# Allegro board democ2.brd
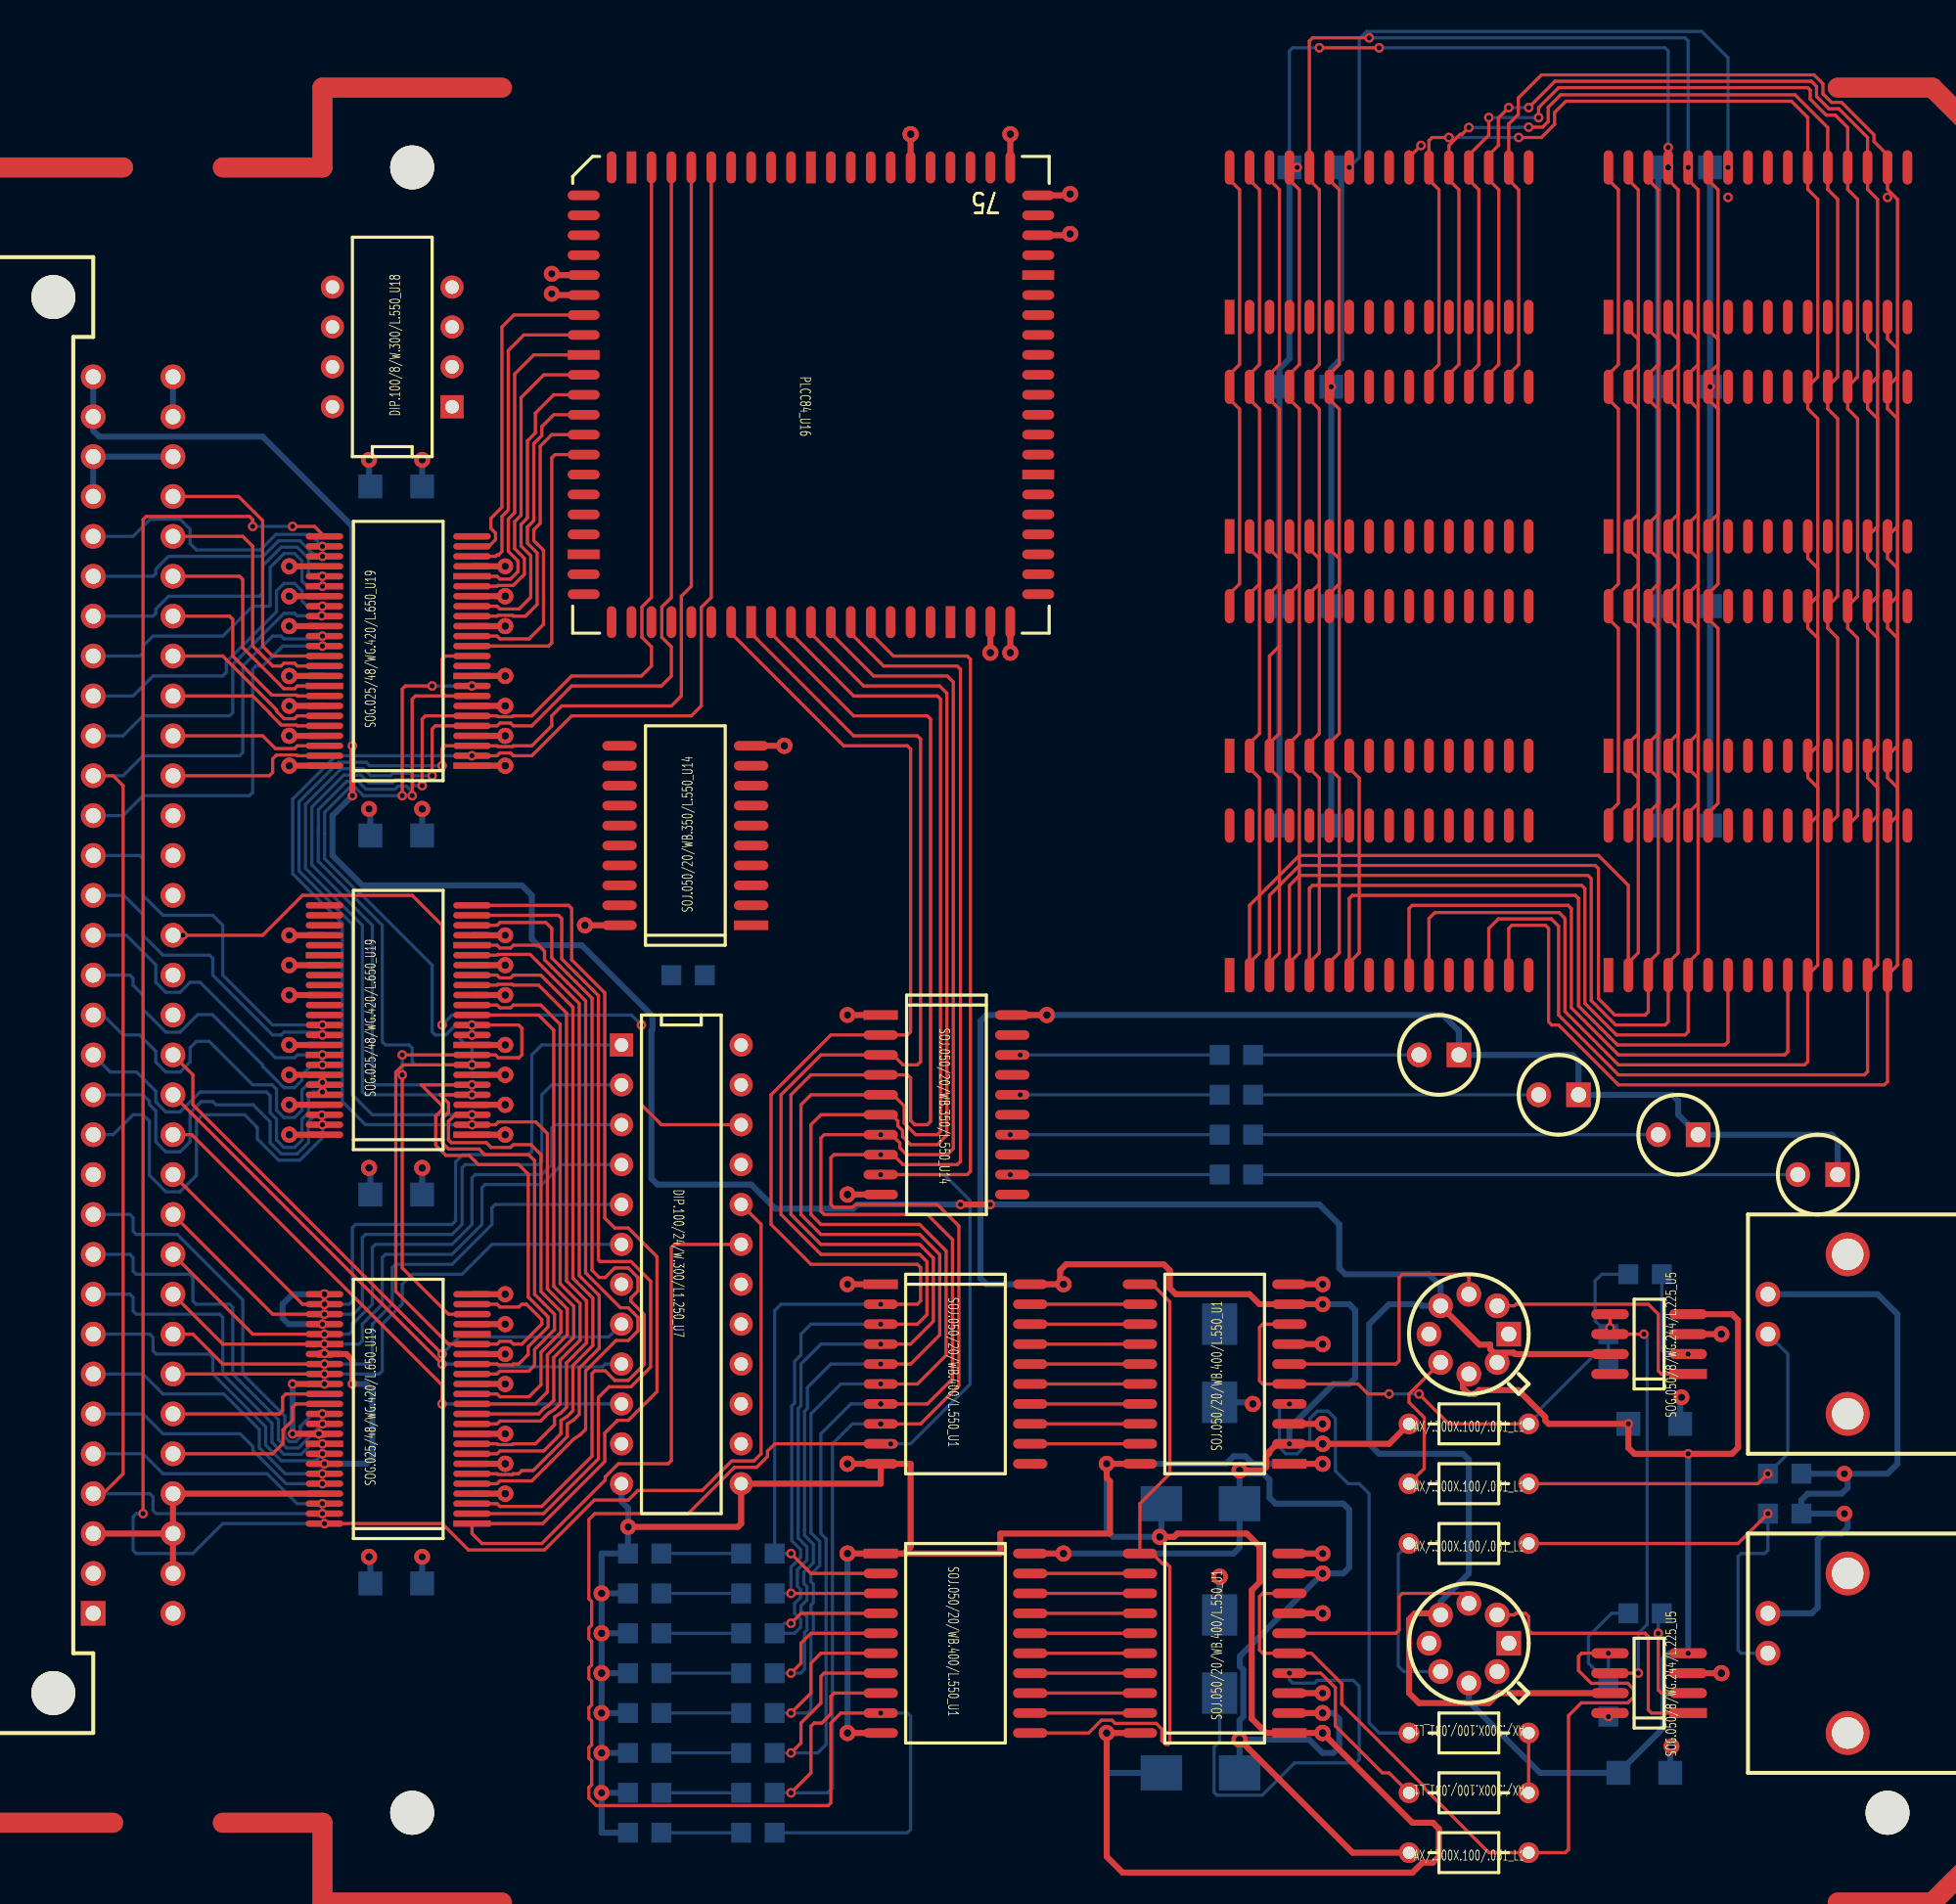
[diagram p0: board, top side]
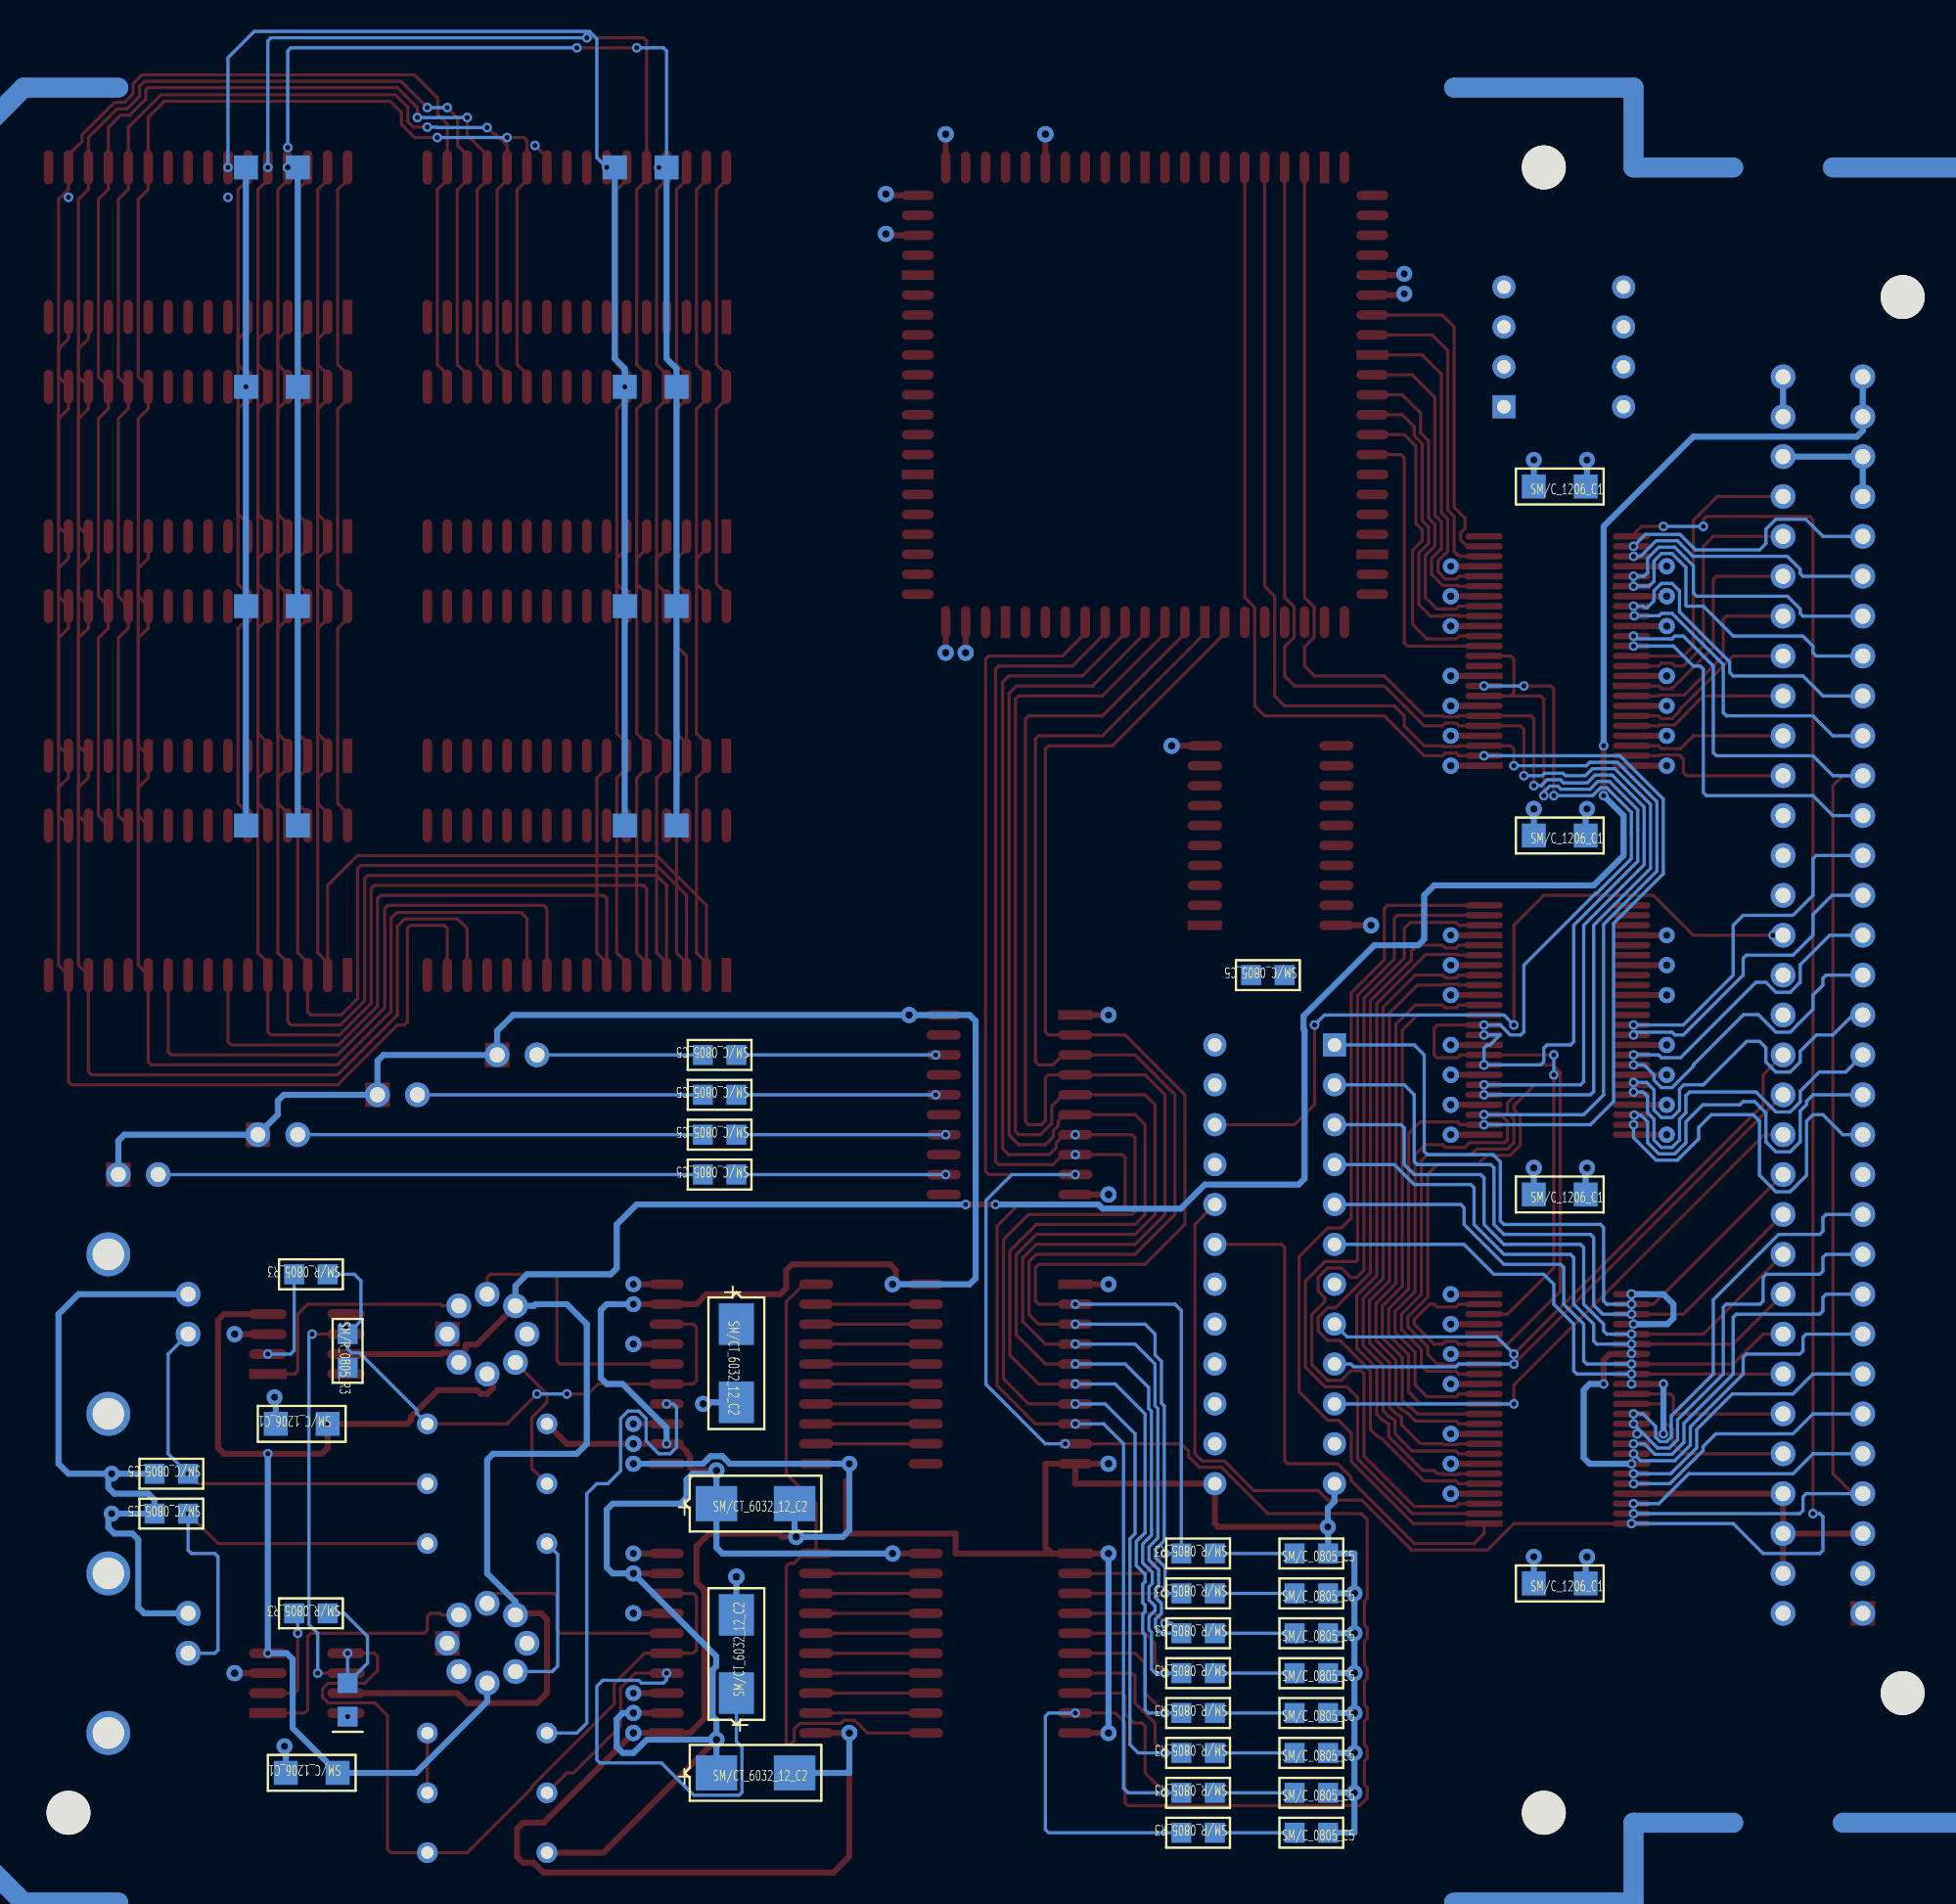
[diagram p1: board, bottom side, seen from below]

No outline. copper layers: TOP, GND, POWER, BOTTOM. Coordinates in mm from the lowest, leftmost part position.

## Design rules (mm)
nets with their own width: min track width 0.203; nets A0 A1 A2 A3 A4 A5 A6 A7 A8 A9 A10 A11 A12 A13 A14 A15 A16 A17 A18 A19 A20 A21 A22 A23 AEN/ BA0 BA1 BA2 BA3 BD0 BD1 BD2 BD3 BD4 BD5 BD6 BD7 BD8 BD9 BD10 BD11 BD12 BD13 BD14 BD15 BRD/ BRESET BWR/ D0 D1 D2 D3 D4 D5 D6 D7 D9 D10 D11 D12 D13 D14 D15 DDIR DEN/ DHEN/ FPGA/ GAIN HS/ MCLK MRD/ MWR/ N00036 N00036_6360 N00038 N00038_6372 N00044 N00044_6366 N00046 N00046_6362 N00048 N00048_6359 N00060 N00060_6368 N00306 N00318 N00322 N00671 N00689 N00703 N00717 N00827 N00831 N00835 N00837 N04966 N05690 N05692 N05694 N05696 N05698 N05700 N05702 N05704 N11940 N11950 N11984 N11994 N12004 N19706 N19710 N19714 N19718 N19934 N19938 N19942 N23417 N23878 N24816 N24821 N24826 N84247 N103899 N255822 N314771 N315146 N315333 N320476 N336036 N336041 OUTA OUTC RA0 RA1 RA2 RA3 RA4 RA5 RA6 RA7 RA8 RA9 RA10 RA11 RA12 RA13 RA14 RA15 RD0 RD1 RD2 RD3 RD4 RD5 RD6 RD7 RDY/ RESET/ SEL VCLKA VCLKC VD0 VD1 VD2 VD3 VD4 VD5 VD6 VD7 WAIT/ WSTAT/
nets with their own width: min track width 0.381; nets AGND GND GND_EARTH V12N V+12 VCC

## Placement (name value [footprint] x y rotation side)
C1  .1UF  [SMC1206]  97.79 27.3 0 bottom
C2  .1UF  [SMCT603212]  73.02 22.22 180 bottom
C3  .1UF  [SMCT603212]  73.02 5.08 180 bottom
C4  .1UF  [SMC1206]  99.69 107.32 0 bottom
C5  3300  [SMC0805]  36.2 3.81 180 bottom
C6  .1UF  [SMC1206]  97.16 5.08 0 bottom
C7  3300  [SMC0805]  36.2 19.05 180 bottom
C8  3300  [SMC0805]  36.2 6.35 180 bottom
C9  .1UF  [SMC1206]  20.95 87 180 bottom
C10  .1UF  [SMC1206]  20.95 64.77 180 bottom
C11  .1UF  [SMC1206]  20.95 41.91 180 bottom
C12  .1UF  [SMC1206]  99.69 79.38 0 bottom
C13  .1UF  [SMC1206]  99.69 93.35 0 bottom
C14  .1UF  [SMC1206]  99.69 65.41 0 bottom
C15  .1UF  [SMC1206]  20.95 17.14 180 bottom
C16  3300  [SMC0805]  36.2 8.89 180 bottom
C17  3300  [SMC0805]  36.2 11.43 180 bottom
C18  47PF  [SMC0805]  106.68 24.13 0 bottom
C19  3300  [SMC0805]  36.2 1.27 180 bottom
C20  3300  [SMC0805]  36.2 13.97 180 bottom
C21  .1UF  [SMCT603212]  71.75 10.16 90 bottom
C22  .1UF  [SMCT603212]  71.75 33.66 270 bottom
C23  47PF  [SMC0805]  106.68 21.59 0 bottom
C24  3300  [SMC0805]  36.2 16.51 180 bottom
C25  .1UF  [SMC1206]  76.2 107.32 0 bottom
C26  .1UF  [SMC1206]  75.56 93.35 0 bottom
C27  .1UF  [SMC1206]  75.56 79.38 0 bottom
C28  .1UF  [SMC1206]  75.56 65.41 0 bottom
D1  DIODE PHOTO EMIT  [LED]  94.61 48.26 180 top
D2  DIODE PHOTO EMIT  [LED]  86.99 50.8 180 top
D3  DIODE PHOTO EMIT  [LED]  102.23 45.72 180 top
D4  DIODE PHOTO EMIT  [LED]  111.12 43.18 180 top
J1  CON PAD  [DIN64P]  0 15.24 90 top
J2  CHANNEL 1  [BNC2P]  106.68 12.7 270 top
J3  CHANNEL 2  [BNC2P]  106.68 33.02 270 top
L1  50  [AX300X100031]  83.82 19.68 0 top
L2  50  [AX300X100031]  83.82 27.3 0 top
L3  50  [AX300X100031]  91.44 3.81 180 top
L4  50  [AX300X100031]  83.82 23.49 0 top
L5  50  [AX300X100031]  91.44 7.62 180 top
L6  50  [AX300X100031]  83.82 0 0 top
MTH1  -  [MTHOLE1]  20.32 107.32 0 top
MTH2  -  [MTHOLE1]  20.32 2.54 0 top
MTH3  -  [MTHOLE1]  114.3 2.54 0 top
R1  150  [SMC0805]  71.75 50.8 0 bottom
R2  150  [SMC0805]  71.75 48.26 0 bottom
R3  100  [SMR0805]  97.79 15.24 0 bottom
R4  100  [SMR0805]  96.52 10.8 270 bottom
R5  100  [SMR0805]  96.52 33.02 270 bottom
R6  100  [SMR0805]  97.79 36.83 0 bottom
R7  50  [SMR0805]  41.27 19.05 0 bottom
R8  50  [SMR0805]  41.27 6.35 0 bottom
R9  50  [SMR0805]  41.27 8.89 0 bottom
R10  50  [SMR0805]  41.27 3.81 0 bottom
R11  50  [SMC0805]  36.83 55.88 0 bottom
R12  150  [SMC0805]  71.75 43.18 0 bottom
R13  50  [SMR0805]  41.27 16.51 0 bottom
R14  50  [SMR0805]  41.27 13.97 0 bottom
R15  50  [SMR0805]  41.27 11.43 0 bottom
R16  50  [SMR0805]  41.27 1.27 0 bottom
R17  150  [SMC0805]  71.75 45.72 0 bottom
U1  TLC5602A  [SOJ05020WB400L550]  76.2 7.62 90 top
U2  TLC5602A  [SOJ05020WB400L550]  76.2 24.77 90 top
U3  TC55B4257J  [SOJ05032WB400L850]  96.52 83.82 0 top
U4  TC55B4257J  [SOJ05032WB400L850]  96.52 97.79 0 top
U5  DG419A  [SOG0508WG244L225]  101.6 30.48 90 top
U6  DG419A  [SOG0508WG244L225]  101.6 8.89 90 top
U7  20L10  [DIP10024W300L1250]  33.66 51.44 270 top
U8  TC55B4257J  [SOJ05032WB400L850]  72.39 69.85 0 top
U9  TC55B4257J  [SOJ05032WB400L850]  72.39 97.79 0 top
U10  TC55B4257J  [SOJ05032WB400L850]  96.52 69.85 0 top
U11  TC55B4257J  [SOJ05032WB400L850]  96.52 55.88 0 top
U12  TC55B4257J  [SOJ05032WB400L850]  72.39 55.88 0 top
U13  TC55B4257J  [SOJ05032WB400L850]  72.39 83.82 0 top
U14  ACT574  [SOJ05020WB350L550]  50.16 53.34 270 top
U15  ACT574  [SOJ05020WB400L550]  50.16 19.05 270 top
U16  EPF8282  [PLCC84]  45.72 107.32 270 top
U17  ACT574  [SOJ05020WB400L550]  50.16 36.2 270 top
U18  EPC1064  [DIP1008W300L550]  22.86 92.08 90 top
U19  FCT16245  [SOG02548WG420L650]  24.13 69.22 90 top
U20  FCT16245  [SOG02548WG420L650]  24.13 20.95 90 top
U21  FCT16245  [SOG02548WG420L650]  24.13 45.72 90 top
U22  TLE2037A  [TO-99]  90.17 33.02 90 top
U23  TLE2037A  [TO-99]  90.17 13.34 90 top
U25  74ACT574  [SOJ05020WB350L550]  41.91 59.05 90 top

## Library data of the parts
C1-C3 C5-C8 C16 C17 C19-C22 C24 = CAP: alternate symbols: (SMCT603212;SMC0805)
C4 C9-C15 C25-C28 = CAP_NP
C18 C23 = CAPACITOR
D1-D4 = DIODE_PHOTO_EMIT
J1 = 64CONSEPPINS
J2 J3 = BNC
L1-L6 = INDUCTOR
MTH1-MTH3 = MTHOLE1
R1-R17 = R: alternate symbols: (SMR0805)
U1 U2 = TLC5602A
U3 U4 U8-U13 = TC56B4257J
U5 U6 = DG419A
U7 = 20L10
U14 U15 U17 = ACT574: alternate symbols: (SOJ05020WB400L550)
U16 = FPGA_0
U18 = EPC1064
U19-U21 = FCT16245
U22 U23 = TLE2037A
U25 = 74ACT574

## Footprints (pads in the part's own frame, mm; a bottom-side part is the same pattern mirrored in y, then rotated)
AX300X100031
  round 1.321 hole 0.787: 1(0,0) 2(7.62,0)
BNC2P
  round 1.575 hole 0.965: 1(0,0) 2(-2.54,0)
  round 2.794 hole 2.007: 3(5.08,5.08) 4(-5.08,5.08)
DIN64P
  rect 1.575x1.575 hole 0.965: 1(0,0)
  round 1.575 hole 0.965: 2(2.54,0) 3(5.08,0) 4(7.62,0) 5(10.16,0) 6(12.7,0) 7(15.24,0) 8(17.78,0) 9(20.32,0) 10(22.86,0) 11(25.4,0) 12(27.94,0) 13(30.48,0) 14(33.02,0) 15(35.56,0) 16(38.1,0) 17(40.64,0) 18(43.18,0) 19(45.72,0) 20(48.26,0) 21(50.8,0) 22(53.34,0) 23(55.88,0) 24(58.42,0) 25(60.96,0) 26(63.5,0) 27(66.04,0) 28(68.58,0) 29(71.12,0) 30(73.66,0) 31(76.2,0) 32(78.74,0) 33(0,-5.08) 34(2.54,-5.08) 35(5.08,-5.08) 36(7.62,-5.08) 37(10.16,-5.08) 38(12.7,-5.08) 39(15.24,-5.08) 40(17.78,-5.08) 41(20.32,-5.08) 42(22.86,-5.08) 43(25.4,-5.08) 44(27.94,-5.08) 45(30.48,-5.08) 46(33.02,-5.08) 47(35.56,-5.08) 48(38.1,-5.08) 49(40.64,-5.08) 50(43.18,-5.08) 51(45.72,-5.08) 52(48.26,-5.08) 53(50.8,-5.08) 54(53.34,-5.08) 55(55.88,-5.08) 56(58.42,-5.08) 57(60.96,-5.08) 58(63.5,-5.08) 59(66.04,-5.08) 60(68.58,-5.08) 61(71.12,-5.08) 62(73.66,-5.08) 63(76.2,-5.08) 64(78.74,-5.08)
  round 2.794 hole 2.794: 65(83.82,2.54) 66(-5.08,2.54)
DIP1008W300L550
  rect 1.473x1.473 hole 0.864: 1(0,0)
  round 1.473 hole 0.864: 2(2.54,0) 3(5.08,0) 4(7.62,0) 5(7.62,7.62) 6(5.08,7.62) 7(2.54,7.62) 8(0,7.62)
DIP10024W300L1250
  rect 1.473x1.473 hole 0.864: 1(0,0)
  round 1.473 hole 0.864: 2(2.54,0) 3(5.08,0) 4(7.62,0) 5(10.16,0) 6(12.7,0) 7(15.24,0) 8(17.78,0) 9(20.32,0) 10(22.86,0) 11(25.4,0) 12(27.94,0) 13(27.94,7.62) 14(25.4,7.62) 15(22.86,7.62) 16(20.32,7.62) 17(17.78,7.62) 18(15.24,7.62) 19(12.7,7.62) 20(10.16,7.62) 21(7.62,7.62) 22(5.08,7.62) 23(2.54,7.62) 24(0,7.62)
LED
  rect 1.575x1.575 hole 0.965: 1(0,0)
  round 1.575 hole 0.965: 2(2.54,0)
MTHOLE1
  round 2.794 hole 2.794: 1(0,0)
PLCC84
  rect 2.032x0.61 smd: 1(0,0) 10(0,-11.43) 40(28.956,-3.81) 50(28.956,8.89)
  oval 2.032x0.61 smd: 2(0,-1.27) 3(0,-2.54) 4(0,-3.81) 5(0,-5.08) 6(0,-6.35) 7(0,-7.62) 8(0,-8.89) 9(0,-10.16) 11(0,-12.7) 33(28.956,-12.7) 34(28.956,-11.43) 35(28.956,-10.16) 36(28.956,-8.89) 37(28.956,-7.62) 38(28.956,-6.35) 39(28.956,-5.08) 41(28.956,-2.54) 42(28.956,-1.27) 43(28.956,0) 44(28.956,1.27) 45(28.956,2.54) 46(28.956,3.81) 47(28.956,5.08) 48(28.956,6.35) 49(28.956,7.62) 51(28.956,10.16) 52(28.956,11.43) 53(28.956,12.7) 75(0,12.7) 76(0,11.43) 77(0,10.16) 78(0,8.89) 79(0,7.62) 80(0,6.35) 81(0,5.08) 82(0,3.81) 83(0,2.54) 84(0,1.27)
  oval 0.61x2.032 smd: 12(1.778,-14.478) 13(3.048,-14.478) 14(4.318,-14.478) 15(5.588,-14.478) 16(6.858,-14.478) 17(8.128,-14.478) 18(9.398,-14.478) 19(10.668,-14.478) 21(13.208,-14.478) 22(14.478,-14.478) 23(15.748,-14.478) 24(17.018,-14.478) 25(18.288,-14.478) 26(19.558,-14.478) 27(20.828,-14.478) 28(22.098,-14.478) 29(23.368,-14.478) 31(25.908,-14.478) 32(27.178,-14.478) 54(27.178,14.478) 55(25.908,14.478) 56(24.638,14.478) 57(23.368,14.478) 58(22.098,14.478) 59(20.828,14.478) 61(18.288,14.478) 62(17.018,14.478) 63(15.748,14.478) 64(14.478,14.478) 65(13.208,14.478) 66(11.938,14.478) 67(10.668,14.478) 68(9.398,14.478) 69(8.128,14.478) 71(5.588,14.478) 72(4.318,14.478) 73(3.048,14.478) 74(1.778,14.478)
  rect 0.61x2.032 smd: 20(11.938,-14.478) 30(24.638,-14.478) 60(19.558,14.478) 70(6.858,14.478)
SMC0805
  rect 1.27x1.27 smd: 1(0,0) 2(2.134,0)
SMC1206
  rect 1.524x1.524 smd: 1(0,0) 2(3.302,0)
SMCT603212
  rect 2.642x2.235 smd: 1(0,0) 2(4.978,0)
SMR0805
  rect 1.27x1.27 smd: 1(0,0) 2(2.134,0)
SOG0508WG244L225
  rect 0.635x2.388 smd: 1(0,0)
  oval 0.635x2.388 smd: 2(1.27,0) 3(2.54,0) 4(3.81,0) 5(3.81,4.978) 6(2.54,4.978) 7(1.27,4.978) 8(0,4.978)
SOG02548WG420L650
  rect 0.406x2.388 smd: 1(0,0) 10(5.715,0) 20(12.065,0) 30(11.43,9.398) 40(5.08,9.398)
  oval 0.406x2.388 smd: 2(0.635,0) 3(1.27,0) 4(1.905,0) 5(2.54,0) 6(3.175,0) 7(3.81,0) 8(4.445,0) 9(5.08,0) 11(6.35,0) 12(6.985,0) 13(7.62,0) 14(8.255,0) 15(8.89,0) 16(9.525,0) 17(10.16,0) 18(10.795,0) 19(11.43,0) 21(12.7,0) 22(13.335,0) 23(13.97,0) 24(14.605,0) 25(14.605,9.398) 26(13.97,9.398) 27(13.335,9.398) 28(12.7,9.398) 29(12.065,9.398) 31(10.795,9.398) 32(10.16,9.398) 33(9.525,9.398) 34(8.89,9.398) 35(8.255,9.398) 36(7.62,9.398) 37(6.985,9.398) 38(6.35,9.398) 39(5.715,9.398) 41(4.445,9.398) 42(3.81,9.398) 43(3.175,9.398) 44(2.54,9.398) 45(1.905,9.398) 46(1.27,9.398) 47(0.635,9.398) 48(0,9.398)
SOJ05020WB350L550
  rect 0.61x2.184 smd: 1(0,0)
  oval 0.61x2.184 smd: 2(1.27,0) 3(2.54,0) 4(3.81,0) 5(5.08,0) 6(6.35,0) 7(7.62,0) 8(8.89,0) 9(10.16,0) 10(11.43,0) 11(11.43,8.382) 12(10.16,8.382) 13(8.89,8.382) 14(7.62,8.382) 15(6.35,8.382) 16(5.08,8.382) 17(3.81,8.382) 18(2.54,8.382) 19(1.27,8.382) 20(0,8.382)
SOJ05020WB400L550
  rect 0.61x2.184 smd: 1(0,0)
  oval 0.61x2.184 smd: 2(1.27,0) 3(2.54,0) 4(3.81,0) 5(5.08,0) 6(6.35,0) 7(7.62,0) 8(8.89,0) 9(10.16,0) 10(11.43,0) 11(11.43,9.525) 12(10.16,9.525) 13(8.89,9.525) 14(7.62,9.525) 15(6.35,9.525) 16(5.08,9.525) 17(3.81,9.525) 18(2.54,9.525) 19(1.27,9.525) 20(0,9.525)
SOJ05032WB400L850
  rect 0.61x2.184 smd: 1(0,0)
  oval 0.61x2.184 smd: 2(1.27,0) 3(2.54,0) 4(3.81,0) 5(5.08,0) 6(6.35,0) 7(7.62,0) 8(8.89,0) 9(10.16,0) 10(11.43,0) 11(12.7,0) 12(13.97,0) 13(15.24,0) 14(16.51,0) 15(17.78,0) 16(19.05,0) 17(19.05,9.525) 18(17.78,9.525) 19(16.51,9.525) 20(15.24,9.525) 21(13.97,9.525) 22(12.7,9.525) 23(11.43,9.525) 24(10.16,9.525) 25(8.89,9.525) 26(7.62,9.525) 27(6.35,9.525) 28(5.08,9.525) 29(3.81,9.525) 30(2.54,9.525) 31(1.27,9.525) 32(0,9.525)
TO-99
  rect 1.575x1.575 hole 0.965: 1(0,0)
  round 1.575 hole 0.965: 2(1.803,0.737) 3(2.54,2.54) 4(1.803,4.343) 5(0,5.08) 6(-1.803,4.343) 7(-2.54,2.54) 8(-1.803,0.737)

## Nets
AGND: C1.2(TP-2) C6.2(TP-2) C21.2(TP-2) C22.2(TP-2) J1.1(TP-1) J1.2(TP-2) J1.33(TP-33) U1.3(TP-3) U1.7(TP-7) U1.10(TP-10) U2.3(TP-3) U2.7(TP-7) U2.10(TP-10) U5.3(TP-3) U6.3(TP-3)
GND: C2.2(TP-2) C3.2(TP-2) C4.2(TP-2) C5.2(TP-2) C7.2(TP-2) C8.2(TP-2) C9.2(TP-2) C10.2(TP-2) C11.2(TP-2) C12.2(TP-2) C13.2(TP-2) C14.2(TP-2) C15.2(TP-2) C16.2(TP-2) C17.2(TP-2) C19.2(TP-2) C20.2(TP-2) C24.2(TP-2) C25.2(TP-2) C26.2(TP-2) C27.2(TP-2) C28.2(TP-2) J1.3(TP-3) J1.34(TP-34) J1.35(TP-35) J1.36(TP-36) U1.1(TP-1) U1.20(TP-20) U2.1(TP-1) U2.20(TP-20) U3.27(TP-27) U4.27(TP-27) U7.11(TP-11) U7.12(TP-12) U7.13(TP-13) U8.27(TP-27) U9.27(TP-27) U10.27(TP-27) U11.27(TP-27) U12.27(TP-27) U13.27(TP-27) U14.1(TP-1) U14.10(TP-10) U15.1(TP-1) U15.10(TP-10) U16.17(TP-17) U16.53(TP-53) U16.74(TP-74) U16.75(TP-75) U17.1(TP-1) U17.10(TP-10) U19.1(TP-1) U19.4(TP-4) U19.10(TP-10) U19.15(TP-15) U19.21(TP-21) U19.28(TP-28) U19.34(TP-34) U19.39(TP-39) U19.45(TP-45) U19.48(TP-48) U20.4(TP-4) U20.10(TP-10) U20.15(TP-15) U20.21(TP-21) U20.24(TP-24) U20.25(TP-25) U20.28(TP-28) U20.34(TP-34) U20.39(TP-39) U20.45(TP-45) U21.1(TP-1) U21.4(TP-4) U21.10(TP-10) U21.15(TP-15) U21.21(TP-21) U21.28(TP-28) U21.34(TP-34) U21.39(TP-39) U21.45(TP-45) U21.48(TP-48) U25.10(TP-10)
GND_EARTH: C18.2(TP-2) C23.2(TP-2) J2.2(TP-2) J3.2(TP-2)
V12N: J1.31(TP-31) J1.32(TP-32) U5.7(TP-7) U6.7(TP-7) U22.4(TP-4) U23.4(TP-4)
VCC: C2.1(TP-1) C3.1(TP-1) C4.1(TP-1) C9.1(TP-1) C10.1(TP-1) C11.1(TP-1) C12.1(TP-1) C13.1(TP-1) C14.1(TP-1) C15.1(TP-1) C25.1(TP-1) C26.1(TP-1) C27.1(TP-1) C28.1(TP-1) D1.1(TP-1) D2.1(TP-1) D3.1(TP-1) D4.1(TP-1) J1.29(TP-29) J1.30(TP-30) J1.62(TP-62) L2.1(TP-1) L6.1(TP-1) U1.2(TP-2) U1.9(TP-9) U2.2(TP-2) U2.9(TP-9) U7.24(TP-24) U14.20(TP-20) U15.20(TP-20) U16.16(TP-16) U16.52(TP-52) U16.72(TP-72) U16.80(TP-80) U17.20(TP-20) U19.7(TP-7) U19.18(TP-18) U19.31(TP-31) U19.42(TP-42) U20.7(TP-7) U20.18(TP-18) U20.31(TP-31) U20.42(TP-42) U21.7(TP-7) U21.18(TP-18) U21.31(TP-31) U21.42(TP-42) U25.20(TP-20)
A0: J1.54(TP-54) U19.47(TP-47)
A1: J1.55(TP-55) U19.46(TP-46)
A2: J1.56(TP-56) U19.44(TP-44)
A3: J1.57(TP-57) U19.43(TP-43)
A4: J1.58(TP-58) U19.41(TP-41)
A5: J1.59(TP-59) U19.40(TP-40)
A6: J1.60(TP-60) U19.38(TP-38)
A7: J1.61(TP-61) U19.37(TP-37)
A8: J1.13(TP-13) U21.47(TP-47)
A9: J1.14(TP-14) U21.46(TP-46)
A10: J1.15(TP-15) U21.44(TP-44)
A11: J1.16(TP-16) U21.43(TP-43)
A12: J1.17(TP-17) U21.41(TP-41)
A13: J1.18(TP-18) U21.40(TP-40)
A14: J1.19(TP-19) U21.38(TP-38)
A15: J1.20(TP-20) U21.37(TP-37)
A16: J1.37(TP-37) U20.36(TP-36)
A17: J1.38(TP-38) U20.35(TP-35)
A18: J1.39(TP-39) U7.6(TP-6) U20.33(TP-33)
A19: J1.40(TP-40) U7.5(TP-5) U20.32(TP-32)
A20: J1.41(TP-41) U7.4(TP-4) U20.30(TP-30)
A21: J1.42(TP-42) U7.3(TP-3) U20.29(TP-29)
A22: J1.43(TP-43) U7.2(TP-2) U20.27(TP-27)
A23: J1.44(TP-44) U7.1(TP-1) U20.26(TP-26)
AEN/: J1.47(TP-47) U7.8(TP-8)
BA0: U16.6(TP-6) U19.2(TP-2) U20.13(TP-13) U21.2(TP-2)
BA1: U16.7(TP-7) U19.3(TP-3) U20.14(TP-14) U21.3(TP-3)
BA2: U16.8(TP-8) U19.5(TP-5) U20.16(TP-16) U21.5(TP-5)
BA3: U16.9(TP-9) U19.6(TP-6) U20.17(TP-17) U21.6(TP-6)
BD0: U16.25(TP-25) U19.13(TP-13)
BD1: U16.24(TP-24) U19.14(TP-14)
BD2: U16.23(TP-23) U19.16(TP-16)
BD3: U16.22(TP-22) U19.17(TP-17)
BD4: U16.21(TP-21) U19.19(TP-19)
BD5: U16.20(TP-20) U19.20(TP-20)
BD6: U16.19(TP-19) U19.22(TP-22)
BD7: U16.18(TP-18) U19.23(TP-23)
BD8: U20.2(TP-2) U21.23(TP-23)
BD9: U20.3(TP-3) U21.22(TP-22)
BD10: U20.5(TP-5) U21.20(TP-20)
BD11: U20.6(TP-6) U21.19(TP-19)
BD12: U20.8(TP-8) U21.17(TP-17)
BD13: U20.9(TP-9) U21.16(TP-16)
BD14: U20.11(TP-11) U21.14(TP-14)
BD15: U20.12(TP-12) U21.13(TP-13)
BRD/: U7.15(TP-15) U16.73(TP-73)
BRESET: U7.14(TP-14) U16.12(TP-12)
BWR/: U7.16(TP-16) U16.54(TP-54)
D0: J1.28(TP-28) U19.26(TP-26) U21.26(TP-26)
D1: J1.27(TP-27) U19.27(TP-27) U21.27(TP-27)
D2: J1.26(TP-26) U19.29(TP-29) U21.29(TP-29)
D3: J1.25(TP-25) U19.30(TP-30) U21.30(TP-30)
D4: J1.24(TP-24) U19.32(TP-32) U21.32(TP-32)
D5: J1.23(TP-23) U19.33(TP-33) U21.33(TP-33)
D6: J1.4(TP-4) J1.22(TP-22) U19.35(TP-35) U20.47(TP-47) U21.35(TP-35)
D7: J1.21(TP-21) U19.36(TP-36) U21.36(TP-36)
D9: J1.5(TP-5) U20.46(TP-46)
D10: J1.6(TP-6) U20.44(TP-44)
D11: J1.7(TP-7) U20.43(TP-43)
D12: J1.8(TP-8) U20.41(TP-41)
D13: J1.9(TP-9) U20.40(TP-40)
D14: J1.10(TP-10) U20.38(TP-38)
D15: J1.11(TP-11) U20.37(TP-37)
DDIR: U7.19(TP-19) U19.24(TP-24) U20.1(TP-1) U21.24(TP-24)
DEN/: U7.20(TP-20) U19.25(TP-25) U20.48(TP-48)
DHEN/: U7.21(TP-21) U21.25(TP-25)
FPGA/: U7.17(TP-17) U16.30(TP-30)
GAIN: U5.6(TP-6) U6.6(TP-6) U16.28(TP-28)
HS/: U7.18(TP-18) U16.29(TP-29)
MCLK: J1.52(TP-52) U16.31(TP-31)
MRD/: J1.46(TP-46) U7.9(TP-9)
MWR/: J1.45(TP-45) U7.10(TP-10)
N00036_6360: L6.2(TP-2) R3.1(TP-1) R4.1(TP-1) U1.5(TP-5) U1.8(TP-8) U6.5(TP-5)
N00038_6372: C21.1(TP-1) L3.2(TP-2) U1.4(TP-4)
N00044_6366: U6.1(TP-1) U23.2(TP-2)
N00046_6362: R4.2(TP-2) U6.8(TP-8)
N00048_6359: R3.2(TP-2) U6.2(TP-2)
N00060_6368: U1.6(TP-6) U23.3(TP-3)
OUTA: L1.1(TP-1) U23.6(TP-6)
OUTC: L4.1(TP-1) U22.6(TP-6)
RA0: U3.5(TP-5) U4.5(TP-5) U8.5(TP-5) U9.5(TP-5) U10.5(TP-5) U11.5(TP-5) U12.5(TP-5) U13.5(TP-5) U16.58(TP-58)
RA1: U3.4(TP-4) U4.4(TP-4) U8.4(TP-4) U9.4(TP-4) U10.4(TP-4) U11.4(TP-4) U12.4(TP-4) U13.4(TP-4) U16.60(TP-60)
RA2: U3.3(TP-3) U4.3(TP-3) U8.3(TP-3) U9.3(TP-3) U10.3(TP-3) U11.3(TP-3) U12.3(TP-3) U13.3(TP-3) U16.61(TP-61)
RA3: U3.2(TP-2) U4.2(TP-2) U8.2(TP-2) U9.2(TP-2) U10.2(TP-2) U11.2(TP-2) U12.2(TP-2) U13.2(TP-2) U16.62(TP-62)
RA4: U3.32(TP-32) U4.32(TP-32) U8.32(TP-32) U9.32(TP-32) U10.32(TP-32) U11.32(TP-32) U12.32(TP-32) U13.32(TP-32) U16.63(TP-63)
RA5: U3.31(TP-31) U4.31(TP-31) U8.31(TP-31) U9.31(TP-31) U10.31(TP-31) U11.31(TP-31) U12.31(TP-31) U13.31(TP-31) U16.64(TP-64)
RA6: U3.30(TP-30) U4.30(TP-30) U8.30(TP-30) U9.30(TP-30) U10.30(TP-30) U11.30(TP-30) U12.30(TP-30) U13.30(TP-30) U16.65(TP-65)
RA7: U3.29(TP-29) U4.29(TP-29) U8.29(TP-29) U9.29(TP-29) U10.29(TP-29) U11.29(TP-29) U12.29(TP-29) U13.29(TP-29) U16.66(TP-66)
RA8: U3.28(TP-28) U4.28(TP-28) U8.28(TP-28) U9.28(TP-28) U10.28(TP-28) U11.28(TP-28) U12.28(TP-28) U13.28(TP-28) U16.67(TP-67)
RA9: U3.22(TP-22) U4.22(TP-22) U8.22(TP-22) U9.22(TP-22) U10.22(TP-22) U11.22(TP-22) U12.22(TP-22) U13.22(TP-22) U16.69(TP-69)
RA10: U3.21(TP-21) U4.21(TP-21) U8.21(TP-21) U9.21(TP-21) U10.21(TP-21) U11.21(TP-21) U12.21(TP-21) U13.21(TP-21) U16.70(TP-70)
RA11: U3.20(TP-20) U4.20(TP-20) U8.20(TP-20) U9.20(TP-20) U10.20(TP-20) U11.20(TP-20) U12.20(TP-20) U13.20(TP-20) U16.71(TP-71)
RA12: U3.19(TP-19) U4.19(TP-19) U8.19(TP-19) U9.19(TP-19) U10.19(TP-19) U11.19(TP-19) U12.19(TP-19) U13.19(TP-19) U16.76(TP-76)
RA13: U3.18(TP-18) U4.18(TP-18) U8.18(TP-18) U9.18(TP-18) U10.18(TP-18) U11.18(TP-18) U12.18(TP-18) U13.18(TP-18) U16.77(TP-77)
RA14: U3.15(TP-15) U4.15(TP-15) U8.15(TP-15) U9.15(TP-15) U10.15(TP-15) U11.15(TP-15) U12.15(TP-15) U13.15(TP-15) U16.78(TP-78)
RA15: U3.14(TP-14) U4.14(TP-14) U8.14(TP-14) U9.14(TP-14) U10.14(TP-14) U11.14(TP-14) U12.14(TP-14) U13.14(TP-14) U16.79(TP-79)
RD0: U4.26(TP-26) U8.26(TP-26) U9.26(TP-26) U10.26(TP-26) U16.81(TP-81)
RD1: U4.23(TP-23) U8.23(TP-23) U9.23(TP-23) U10.23(TP-23) U16.82(TP-82)
RD2: U4.10(TP-10) U8.10(TP-10) U9.10(TP-10) U10.10(TP-10) U16.83(TP-83)
RD3: U4.7(TP-7) U8.7(TP-7) U9.7(TP-7) U10.7(TP-7) U16.84(TP-84)
RD4: U3.26(TP-26) U11.26(TP-26) U12.26(TP-26) U13.26(TP-26) U16.1(TP-1)
RD5: U3.23(TP-23) U11.23(TP-23) U12.23(TP-23) U13.23(TP-23) U16.2(TP-2)
RD6: U3.10(TP-10) U11.10(TP-10) U12.10(TP-10) U13.10(TP-10) U16.3(TP-3)
RD7: U3.7(TP-7) U11.7(TP-7) U12.7(TP-7) U13.7(TP-7) U16.4(TP-4)
RDY/: J1.50(TP-50) U7.22(TP-22)
RESET/: J1.53(TP-53) U16.15(TP-15)
SEL: U7.23(TP-23) U16.13(TP-13)
V+12: C1.1(TP-1) C6.1(TP-1) J1.63(TP-63) J1.64(TP-64) U5.4(TP-4) U6.4(TP-4) U22.7(TP-7) U23.7(TP-7)
VCLKA: U1.11(TP-11) U2.11(TP-11) U15.11(TP-11) U16.34(TP-34)
VCLKC: R11.2(TP-2) U17.11(TP-11)
VD0: R7.2(TP-2) U14.2(TP-2) U15.2(TP-2) U16.39(TP-39) U17.2(TP-2)
VD1: R13.2(TP-2) U14.3(TP-3) U15.3(TP-3) U16.40(TP-40) U17.3(TP-3)
VD2: R14.2(TP-2) U14.4(TP-4) U15.4(TP-4) U16.41(TP-41) U17.4(TP-4)
VD3: R15.2(TP-2) U14.5(TP-5) U15.5(TP-5) U16.42(TP-42) U17.5(TP-5)
VD4: R9.2(TP-2) U14.6(TP-6) U15.6(TP-6) U16.43(TP-43) U17.6(TP-6)
VD5: R8.2(TP-2) U14.7(TP-7) U15.7(TP-7) U16.44(TP-44) U17.7(TP-7)
VD6: R10.2(TP-2) U14.8(TP-8) U15.8(TP-8) U16.45(TP-45) U17.8(TP-8)
VD7: R16.2(TP-2) U14.9(TP-9) U15.9(TP-9) U16.46(TP-46) U17.9(TP-9)
WAIT/: J1.51(TP-51) U16.33(TP-33)
WSTAT/: U14.11(TP-11) U16.56(TP-56)
N00036: L2.2(TP-2) R5.1(TP-1) R6.1(TP-1) U2.5(TP-5) U2.8(TP-8) U5.5(TP-5)
N00038: C22.1(TP-1) L5.2(TP-2) U2.4(TP-4)
N00044: U5.1(TP-1) U22.2(TP-2)
N00046: R5.2(TP-2) U5.8(TP-8)
N00048: R6.2(TP-2) U5.2(TP-2)
N00060: U2.6(TP-6) U22.3(TP-3)
N00306: U1.12(TP-12) U15.19(TP-19)
N00318: U1.15(TP-15) U15.16(TP-16)
N00322: U1.16(TP-16) U15.15(TP-15)
N00671: C19.1(TP-1) R16.1(TP-1)
N00689: C5.1(TP-1) R10.1(TP-1)
N00703: C8.1(TP-1) R8.1(TP-1)
N00717: C16.1(TP-1) R9.1(TP-1)
N00827: C17.1(TP-1) R15.1(TP-1)
N00831: C20.1(TP-1) R14.1(TP-1)
N00835: C24.1(TP-1) R13.1(TP-1)
N00837: C7.1(TP-1) R7.1(TP-1)
N04966: L3.1(TP-1) L5.1(TP-1)
N05690: U2.12(TP-12) U17.19(TP-19)
N05692: U2.18(TP-18) U17.13(TP-13)
N05694: U2.13(TP-13) U17.18(TP-18)
N05696: U2.19(TP-19) U17.12(TP-12)
N05698: U2.17(TP-17) U17.14(TP-14)
N05700: U2.14(TP-14) U17.17(TP-17)
N05702: U2.15(TP-15) U17.16(TP-16)
N05704: U2.16(TP-16) U17.15(TP-15)
N11940: U1.13(TP-13) U15.18(TP-18)
N11950: U1.14(TP-14) U15.17(TP-17)
N11984: U1.17(TP-17) U15.14(TP-14)
N11994: U1.18(TP-18) U15.13(TP-13)
N12004: U1.19(TP-19) U15.12(TP-12)
N19706: R1.1(TP-1) U14.18(TP-18)
N19710: R2.1(TP-1) U14.16(TP-16)
N19714: R17.1(TP-1) U14.14(TP-14)
N19718: R12.1(TP-1) U14.12(TP-12)
N19934: D4.2(TP-2) R12.2(TP-2)
N19938: D3.2(TP-2) R17.2(TP-2)
N19942: D1.2(TP-2) R2.2(TP-2)
N23417: U10.6(TP-6) U13.6(TP-6) U16.48(TP-48)
N23878: R11.1(TP-1) U16.36(TP-36)
N24816: U16.14(TP-14) U18.1(TP-1)
N24821: U16.10(TP-10) U18.2(TP-2)
N24826: U16.11(TP-11) U18.3(TP-3) U18.4(TP-4)
N84247: U19.9(TP-9) U20.22(TP-22) U21.9(TP-9) U21.12(TP-12)
N103899: U19.8(TP-8) U19.12(TP-12) U20.19(TP-19) U20.23(TP-23) U21.8(TP-8) U21.11(TP-11)
N255822: D2.2(TP-2) R1.2(TP-2)
N314771: U3.6(TP-6) U4.6(TP-6) U16.51(TP-51)
N315146: U9.6(TP-6) U11.6(TP-6) U16.50(TP-50)
N315333: U8.6(TP-6) U12.6(TP-6) U16.49(TP-49)
N320476: U3.11(TP-11) U4.11(TP-11) U8.11(TP-11) U9.11(TP-11) U10.11(TP-11) U11.11(TP-11) U12.11(TP-11) U13.11(TP-11) U16.57(TP-57)
N336036: C23.1(TP-1) J2.1(TP-1) L1.2(TP-2)
N336041: C18.1(TP-1) J3.1(TP-1) L4.2(TP-2)

Pads without a net: J1 12 48 49 65 66; J2 3 4; J3 3 4; MTH1 1; MTH2 1; MTH3 1; U3 1 8 9 12 13 16 17 24 25; U4 1 8 9 12 13 16 17 24 25; U7 7; U8 1 8 9 12 13 16 17 24 25; U9 1 8 9 12 13 16 17 24 25; U10 1 8 9 12 13 16 17 24 25; U11 1 8 9 12 13 16 17 24 25; U12 1 8 9 12 13 16 17 24 25; U13 1 8 9 12 13 16 17 24 25; U14 13 15 17 19; U16 5 26 27 32 35 37 38 47 55 59 68; U18 5 6 7 8; U19 11; U20 20; U22 1 5 8; U23 1 5 8; U25 1 2 3 4 5 6 7 8 9 11 12 13 14 15 16 17 18 19

## Via types
v1: diameter 0.61, hole 0.33, TOP to BOTTOM, 176 vias
v2: diameter 1.016, hole 0.457, TOP to BOTTOM, 186 vias

## Routing (per net, layer and track width the routed paths; a pad name or vN(x,y) marks a point on that pad's centre or on a via; arc(x,y) is an arc through that point)
AGND: length 38.4
  TOP w0.381: U2.3 v2(78.32,27.3) ; U6.3 v2(103.72,11.43) ; v2(103.72,33.02) U5.3 ; v2(78.32,15.24) U1.7 ; U1.3 v2(78.32,10.16) ; v2(78.32,36.2) U2.10 ; 76.2,32.38 v2(78.32,32.38) ; v2(78.32,19.05) U1.10
  GND w0.381: 0,14.12 J1.1 ; J1.1 -1.12,15.24 ; J1.1 1.12,15.24 ; J1.1 0,16.36 ; J1.33 6.2,15.24 ; J1.33 5.08,14.12 ; J1.33 3.96,15.24 ; J1.33 5.08,16.36 ; 0,16.66 J1.2 ; J1.2 0,18.9 ; J1.2 -1.12,17.78 ; J1.2 1.12,17.78
  BOTTOM w0.381: C1.2 101.09,28.91 v2(101.18,29) ; v2(73.87,28.57) 73.77,28.68 C22.2 ; C6.2 100.46,6.69 v2(100.54,6.77) ; C21.2 v2(71.75,17.57)
GND: length 499.1
  TOP w0.203: U9.27 78.74,106.53 79.38,105.89 79.38,94.77 78.74,94.13 U13.27 78.74,92.56 79.38,91.92 79.38,80.8 78.74,80.16 U8.27 ; U11.27 102.87,66.19 103.5,66.83 103.5,77.95 102.87,78.59 U10.27 102.87,80.16 103.5,80.8 103.5,91.92 102.87,92.56 U3.27 102.87,94.13 103.5,94.77 103.5,105.89 102.87,106.53 U4.27
  TOP w0.381: U20.39 v1(14.38,26.67) ; J1.34 J1.35 ; J1.35 J1.36 U20.45 ; J1.35 J1.3 ; v2(48.05,19.05) U15.1 51.65,19.05 ; U20.10 v2(26.25,26.67) ; U16.74 62.15,105.54 v2(62.23,105.62) ; U21.1 v2(26.25,45.72) ; v2(29.21,99.27) 29.29,99.19 U16.17 ; U20.21 v2(26.25,33.66) ; v2(26.25,47.62) U21.4 ; v2(78.32,24.77) U2.1 ; v2(26.25,81.92) U19.21 ; U21.34 v2(12.49,54.61) ; U20.4 v2(26.25,22.86) ; v2(48.05,24.77) U17.10 ; U17.10 50.16,23.49 U7.13 41.27,20.95 41.06,20.74 v2(34.08,20.74) ; U17.10 52.07,24.77 52.07,19.47 51.65,19.05 ; U20.15 v2(26.25,29.84) ; U16.75 v2(58.42,109.43) ; U21.48 v2(12.49,45.72) ; 14.73,51.44 v2(12.49,51.44) ; U19.28 v2(12.49,81.92) ; U19.1 v2(26.25,69.22) ; 51.65,19.05 57.79,19.05 57.79,20.32 64.77,20.32 64.77,23.65 64.56,23.86 v2(64.56,24.77) U2.20 ; U20.24 v2(26.25,35.56) ; v2(12.49,71.12) U19.45 ; U1.20 v2(64.56,7.62) 64.56,-0.25 65.58,-1.27 84.04,-1.27 84.68,-0.63 85.34,-0.63 85.72,-0.25 85.72,1.52 85.34,1.91 84.03,1.91 v2(78.32,7.62) U1.1 74.71,7.62 73.8,8.53 73.8,16.72 74.29,17.21 74.29,19.51 73.48,20.32 69.06,20.32 68.85,20.11 v2(67.94,20.11) ; v2(48.05,7.62) U15.10 ; v2(26.25,54.61) U21.15 ; v1(14.73,29.84) v1(12.7,29.84) ; v2(58.42,76.41) U16.53 ; 14.73,26.61 14.32,26.61 14.25,26.67 v1(12.7,26.67) ; U19.39 v2(12.49,74.93) ; U14.10 v2(48.05,41.91) ; v2(26.25,58.42) U21.21 ; U21.45 v2(12.49,47.62) ; U19.34 v2(12.49,78.11) ; U14.1 v2(48.05,53.34) ; U21.28 v2(12.49,58.42) ; v2(12.49,69.22) U19.48 ; v2(48.05,36.2) U17.1 ; v2(44.03,70.48) U25.10 ; v2(26.25,78.11) U19.15 ; v2(26.25,74.93) U19.10 ; v2(26.25,51.44) 24.13,51.44 ; v2(26.25,71.12) U19.4
  GND w0.381: 41.27,22.25 U7.13 ; U7.13 42.52,23.49 ; U7.13 40.03,23.49 ; J1.36 5.08,23.98 ; J1.36 3.96,22.86 ; J1.36 5.08,21.74 ; J1.36 6.2,22.86 ; 3.96,17.78 J1.34 ; J1.34 5.08,18.9 ; J1.34 6.2,17.78 ; 3.96,20.32 J1.35 ; J1.35 6.2,20.32 ; J1.35 5.08,19.2 ; J1.35 5.08,21.44 ; U7.11 34.9,26.04 ; U7.11 32.41,26.04 ; U7.11 33.66,24.79 ; 33.66,22.25 U7.12 ; U7.12 32.41,23.49 ; U7.12 33.66,24.74 ; U7.12 34.9,23.49 ; J1.3 0,21.44 ; J1.3 -1.12,20.32 ; J1.3 1.12,20.32
  BOTTOM w0.381: v2(32.38,16.51) v2(32.38,13.97) ; v2(32.38,16.51) 32.38,19.05 C7.2 34.06,20.73 v2(34.08,20.74) 34.08,21.94 33.66,22.36 U7.12 ; v2(32.38,16.51) C24.2 ; v2(32.38,13.97) v2(32.38,11.43) ; v2(32.38,13.97) C20.2 ; C4.2 v1(103,93.35) C12.2 C14.2 ; v2(64.56,7.62) 64.56,5.08 C3.2 ; v2(32.38,11.43) C17.2 ; v2(32.38,11.43) v2(32.38,8.89) ; C15.2 17.65,18.75 v2(17.57,18.84) ; v2(32.38,8.89) C16.2 ; v2(32.38,8.89) v2(32.38,6.35) ; v2(17.57,66.46) 17.65,66.38 C10.2 ; v1(14.61,33.66) 12.45,33.66 12.06,34.04 12.06,34.92 12.7,35.56 v1(14.73,35.56) ; v2(48.05,19.05) v2(48.05,7.62) ; C5.2 v2(32.38,3.81) ; v2(32.38,3.81) v2(32.38,6.35) ; v2(32.38,3.81) 32.38,1.27 C19.2 ; v1(12.7,29.84) v1(12.7,26.67) ; C2.2 68.05,20.21 v2(67.94,20.11) 64.98,20.11 64.56,20.53 v2(64.56,24.77) 72.17,24.77 72.65,25.24 73.4,25.24 73.88,24.77 v2(78.32,24.77) ; C8.2 v2(32.38,6.35) ; C11.2 17.65,43.52 v2(17.57,43.6) ; C25.2 79.5,95.14 78.87,94.5 v1(78.87,93.35) 78.87,65.41 ; v2(17.57,88.69) 17.57,87.08 C9.2
GND_EARTH: length 43.4
  BOTTOM w0.381: J2.2 109.47,15.24 109.85,15.62 109.85,19.94 110.24,20.32 111.38,20.32 111.76,20.7 111.76,21.38 v2(111.55,21.59) C23.2 108.81,22.45 109.22,22.86 111.38,22.86 111.76,23.24 111.76,23.92 v2(111.55,24.13) ; v2(111.55,24.13) 114.3,24.13 114.93,24.77 114.93,34.29 113.66,35.56 J3.2 ; v2(111.55,24.13) C18.2
V12N: length 199.4
  TOP w0.381: v1(85.83,34.82) 88.3,32.35 88.99,32.35 88.99,32.07 89.22,31.84 90.48,31.84 90.57,31.75 U5.7 ; v1(85.83,15.14) 85.72,15.24 84.2,15.24 83.82,14.86 83.82,10.16 84.45,9.53 88.9,9.53 89.53,10.16 U6.7 ; v1(16.51,67.31) v1(16.51,70.48) ; v1(57.15,41.27) v1(55.25,41.27)
  BOTTOM w0.381: v1(55.25,41.27) 48.69,41.27 48.43,41.01 43.45,41.01 41.91,42.55 35.94,42.55 35.56,42.93 35.56,52.35 35.62,52.42 35.62,53.28 31.12,57.78 28.32,57.78 27.94,58.17 27.94,60.96 27.3,61.59 17.14,61.59 15.24,63.5 15.24,66.04 v1(16.51,67.31) ; v1(57.15,41.27) 78.1,41.27 79.38,40.01 79.38,37.21 79.76,36.83 85.09,36.83 85.83,36.09 v1(85.83,34.82) 84.64,34.82 84.54,34.92 82.55,34.92 81.28,33.66 81.28,26.04 81.91,25.4 87.25,25.4 87.63,25.02 87.63,17.78 85.83,15.98 v1(85.83,15.14) ; J1.32 J1.31 0,90.55 0.38,90.17 10.79,90.17 16.51,84.46 v1(16.51,70.48)
VCC: length 398.5
  TOP w0.381: U19.18 v2(26.25,80.01) ; U21.31 v2(12.49,56.52) ; v2(12.49,49.53) U21.42 ; v2(52.07,109.43) U16.80 ; 14.73,31.81 14.44,31.81 14.34,31.71 15.12,31.71 15.16,31.75 16.13,31.75 16.51,31.37 v1(16.51,29.84) ; v2(73.02,24.34) 74.51,24.34 74.71,24.55 74.71,25.23 74.91,25.44 74.91,25.54 75.41,26.04 v1(76.2,26.04) v2(78.32,26.04) 82.55,26.04 L2.1 ; v2(26.25,31.75) U20.18 ; v2(78.32,34.92) 74.29,34.92 73.66,35.56 68.96,35.56 68.58,35.94 68.58,37.08 68.2,37.46 61.98,37.46 61.59,37.08 61.59,36.41 v2(61.81,36.2) U17.20 ; L6.1 80.22,0 v2(73.02,7.2) ; v2(12.49,73.03) U19.42 ; U19.7 v2(26.25,73.03) ; U20.7 v2(26.25,24.77) ; U16.16 29.29,100.46 v2(29.21,100.54) ; v2(57.15,76.41) U16.52 ; U15.20 v2(61.81,19.05) ; v2(78.32,17.78) U1.9 ; v2(62.23,103.08) 62.15,103 60.2,103 ; U19.31 v2(12.49,80.01) ; U21.7 v2(26.25,49.53) ; U21.18 v2(26.25,56.52) ; U20.31 v1(14.73,31.79) ; U14.20 v2(60.75,53.34) ; U25.20 v2(31.33,59.05) ; U1.2 v2(78.32,8.89)
  POWER w0.381: 82.65,27.3 L2.1 ; L2.1 84.99,27.3 ; L2.1 83.82,26.13 ; L2.1 83.82,28.48 ; J1.30 1.12,88.9 ; J1.30 0,87.78 ; J1.30 0,90.02 ; J1.30 -1.12,88.9 ; D2.1 88.14,50.8 ; D2.1 86.99,49.65 ; D2.1 85.85,50.8 ; D2.1 86.99,51.95 ; 109.98,43.18 D4.1 ; D4.1 111.12,44.33 ; D4.1 111.12,42.03 ; D4.1 112.27,43.18 ; 0,85.24 J1.29 ; J1.29 0,87.48 ; J1.29 1.12,86.36 ; J1.29 -1.12,86.36 ; 94.61,47.11 D1.1 ; D1.1 95.76,48.26 ; D1.1 94.61,49.41 ; D1.1 93.47,48.26 ; D3.1 103.38,45.72 ; D3.1 102.23,44.57 ; D3.1 102.23,46.87 ; D3.1 101.09,45.72 ; 3.96,88.9 J1.62 ; J1.62 6.2,88.9 ; J1.62 5.08,90.02 ; J1.62 5.08,87.78 ; L6.1 84.99,0 ; L6.1 83.82,1.17 ; L6.1 82.65,0 ; L6.1 83.82,-1.17 ; U7.24 42.52,51.44 ; U7.24 40.03,51.44 ; U7.24 41.27,52.68
  BOTTOM w0.381: v2(78.32,8.89) 78.99,8.89 79.38,8.51 79.38,6.73 78.99,6.35 78.31,6.35 77.46,7.2 v2(73.02,7.2) ; v2(73.02,7.2) 73.02,8.43 73.27,8.67 73.27,11.65 73.04,11.87 73.04,12.5 v2(78.32,17.78) 79.63,17.78 80.01,18.16 80.01,21.84 79.63,22.22 75.31,22.22 74.93,22.61 74.93,23.75 74.55,24.13 73.24,24.13 v2(73.02,24.34) C2.1 73.02,19.43 72.64,19.05 v2(61.81,19.05) ; v2(73.02,7.2) C3.1 ; C28.1 C27.1 C26.1 75.56,94.5 76.2,95.14 C25.1 ; J1.29 J1.30 J1.62 ; v2(20.95,18.84) C15.1 ; v2(20.95,66.46) C10.1 ; D4.1 111.12,45.34 110.74,45.72 D3.1 100.96,46.99 100.96,47.88 100.58,48.26 D1.1 94.61,50.42 94.23,50.8 D2.1 86.99,52.32 85.98,53.34 v2(60.75,53.34) 56.9,53.34 56.52,52.96 56.52,36.58 56.9,36.2 v2(61.81,36.2) ; v1(14.73,24.77) 17.4,24.77 17.78,25.15 17.78,29.46 17.4,29.84 v1(16.51,29.84) ; v2(20.95,43.6) C11.1 ; v2(20.95,88.69) C9.1 ; C4.1 C13.1 C12.1 C14.1 ; v2(78.32,34.92) 80.01,34.92 80.39,34.54 80.39,30.23 80.01,29.84 79,29.84 76.2,27.04 v1(76.2,26.04)
  vias: v1(104.14,105.41) v1(114.3,105.41)
A0: length 10.7
  TOP w0.203: J1.54 11.23,68.58 11.43,68.78 11.43,69.65 11.68,69.9 12.95,69.9 13,69.85 U19.47
A1: length 10.1
  TOP w0.203: J1.55 10.79,71.12 11.61,70.31 12.83,70.31 13,70.48 U19.46
A2: length 10.5
  TOP w0.203: J1.56 10.16,73.66 11.27,72.55 11.27,72.52 11.98,71.81 12.95,71.81 13,71.76 U19.44
A3: length 11.4
  TOP w0.203: U19.43 13,72.39 12.83,72.21 12.15,72.21 11.68,72.69 11.68,72.78 8.25,76.2 J1.57
A4: length 13.1
  TOP w0.203: U19.41 13,73.66 12.95,73.71 11.38,73.71 8.89,76.2 8.89,78.54 8.69,78.74 J1.58
A5: length 15.2
  TOP w0.203: U19.40 13,74.3 12.83,74.12 12.15,74.12 9.52,76.74 9.52,81.08 9.32,81.28 J1.59
A6: length 16.9
  TOP w0.203: J1.60 9.52,83.82 10.16,83.19 10.16,76.84 11.43,75.57 11.97,75.57 12.15,75.74 12.83,75.74 13,75.57 U19.38
A7: length 18.5
  TOP w0.203: U19.37 11.43,76.2 10.79,76.84 10.79,84.83 9.26,86.36 J1.61
A8: length 26.3
  BOTTOM w0.203: v1(14.61,46.35) 14.61,45.53 13.17,44.09 11.81,44.09 10.46,45.45 10.46,46.18 9.64,46.99 6.99,46.99 6.58,46.58 6.58,43.13 5.53,42.09 4.63,42.09 3.58,43.13 3.58,46.58 3.17,46.99 2.54,46.99 1.27,45.72 v1(0,45.72)
A9: length 23.7
  BOTTOM w0.203: v1(0,48.26) 3.17,48.26 3.58,47.85 3.58,47.64 3.99,47.23 3.99,45.27 4.63,44.63 5.53,44.63 6.17,45.27 6.17,47.11 6.89,47.83 7.62,47.83 7.82,47.62 10.19,47.62 11.27,46.54 11.27,45.21 11.98,44.5 13,44.5 13.71,45.21 13.71,46.54 14.13,46.96 v1(14.56,46.96)
A10: length 22.8
  BOTTOM w0.203: v1(14.61,48.44) 14,48.44 13.71,48.15 13.71,47.12 13.3,46.71 13.3,45.38 12.83,44.91 12.15,44.91 11.68,45.38 11.68,46.71 11.27,47.12 11.27,48.2 11.03,48.44 6.8,48.44 5.53,47.17 4.63,47.17 3.99,47.81 3.99,48.49 2.77,49.71 1.09,49.71 v1(0,50.8)
A11: length 22.3
  BOTTOM w0.203: v1(14.61,49.05) 13.78,49.05 13.3,48.57 13.3,47.29 12.83,46.81 12.15,46.81 11.68,47.29 11.68,48.62 11.4,48.89 10.16,48.89 7.39,51.66 6.58,51.66 6.17,51.26 6.17,50.35 5.53,49.71 4.63,49.71 3.99,50.35 3.99,51.03 2.95,52.07 1.9,52.07 0.63,53.34 v1(0,53.34)
A12: length 20.1
  BOTTOM w0.203: v1(0,55.88) 2.34,55.88 2.54,55.68 2.54,55.24 3.17,54.61 3.17,53.7 4.63,52.25 5.53,52.25 6.65,53.37 7.59,53.37 10.79,50.16 10.79,50.07 12.15,48.72 12.83,48.72 13.3,49.19 13.3,49.53 13.94,50.16 v1(14.61,50.16)
A13: length 19.1
  BOTTOM w0.203: v1(14.61,50.8) 13,50.8 12.83,50.62 11.61,50.62 6.8,55.43 6.17,55.43 5.53,54.79 4.63,54.79 3.99,55.43 3.99,56.54 2.11,58.42 v1(0,58.42)
A14: length 19.8
  BOTTOM w0.203: v1(0,60.96) 1.96,60.96 3.17,59.74 3.17,58.42 4.44,57.15 7.42,57.15 7.62,56.95 7.62,55.88 11.43,52.07 11.97,52.07 12.15,52.25 14.43,52.25 v1(14.61,52.07)
A15: length 22.3
  BOTTOM w0.203: v1(0,63.5) 2.97,63.5 3.17,63.3 3.17,60.96 4.44,59.69 7.62,59.69 8.25,59.05 8.25,55.88 11.43,52.7 v1(14.61,52.7)
A16: length 12
  TOP w0.203: J1.37 11.43,25.4 12.09,26.06 12.09,26.92 12.7,27.53 12.7,28.37 12.9,28.57 U20.36
A17: length 10.7
  TOP w0.203: J1.38 11.86,27.94 12.06,28.14 12.06,29.01 12.27,29.21 U20.35
A18: length 34.5
  TOP w0.203: J1.39 v1(14.73,30.48)
  BOTTOM w0.203: U7.6 25.4,38.73 23.49,36.83 20.32,36.83 19.69,36.2 19.69,34.92 18.41,33.66 18.41,30.68 18.21,30.48 v1(14.73,30.48)
A19: length 36.9
  TOP w0.203: J1.40 6.35,33.02 8.25,31.11 v1(14.73,31.11)
  BOTTOM w0.203: v1(14.73,31.11) 17.58,31.11 17.78,31.32 17.78,33.66 19.05,34.92 19.05,37.26 19.25,37.46 22.86,37.46 25.4,40.01 25.4,41.07 25.6,41.27 U7.5
A20: length 38.4
  TOP w0.203: J1.41 8.25,32.38 v1(14.73,32.38)
  BOTTOM w0.203: U7.4 29.84,43.81 28.58,42.55 24.97,42.55 24.77,42.34 24.77,40.01 22.86,38.1 18.62,38.1 18.41,37.9 18.41,34.92 17.14,33.66 17.14,32.59 16.94,32.38 v1(14.73,32.38)
A21: length 41.7
  TOP w0.203: v1(14.73,33.02) 10.16,33.02 J1.42
  BOTTOM w0.203: v1(14.73,33.02) 16.31,33.02 16.51,33.22 16.51,33.66 17.78,34.92 17.78,38.53 17.98,38.73 22.86,38.73 24.13,40.01 24.13,42.98 24.33,43.18 28.58,43.18 29.21,43.81 29.21,46.15 29.41,46.35 U7.3
A22: length 44.4
  TOP w0.203: v1(14.73,34.29) 11.43,34.29 J1.43
  BOTTOM w0.203: U7.2 29.21,48.89 28.58,48.26 28.58,44.02 28.37,43.81 23.7,43.81 23.49,43.61 23.49,40.01 22.86,39.37 17.35,39.37 17.14,39.17 17.14,34.87 16.57,34.29 v1(14.73,34.29)
A23: length 47.4
  TOP w0.203: v1(14.73,34.92) 13.34,34.92 J1.44
  BOTTOM w0.203: v1(14.73,34.92) 16.31,34.92 16.51,35.13 16.51,39.8 16.71,40.01 22.86,40.01 23.09,40.23 23.09,43.99 23.55,44.45 27.74,44.45 27.94,44.65 27.94,50.8 28.58,51.44 v1(33.66,51.44)
AEN/: length 38.4
  TOP w0.203: v1(22.23,31.75) 6.35,47.62 6.35,49.53 v1(5.08,50.8)
  BOTTOM w0.203: v1(22.23,31.75) 23.32,32.84 32.84,32.84 U7.8
BA0: length 120.4
  TOP w0.203: v1(24.13,69.85) 25.73,69.85 25.91,70.03 26.58,70.03 26.76,69.85 27.94,69.85 30.48,72.39 38.1,72.39 38.73,73.03 38.73,79.3 39.37,79.93 U16.6 ; v1(24.13,46.35) 25.63,46.35 25.81,46.53 28.19,46.53 28.93,45.8 28.93,35.9 30.2,34.63 30.2,32.97 28.93,31.7 28.93,29.34 28.17,28.57 U20.13
  BOTTOM w0.203: v1(24.13,46.35) 17.35,46.35 15.88,47.83 15.88,59.17 12.71,62.34 12.71,67.09 15.47,69.85 v1(24.13,69.85)
BA1: length 120.3
  TOP w0.203: U20.14 25.73,29.21 25.91,29.03 27.76,29.03 28.52,29.79 28.52,31.87 29.79,33.14 29.79,34.46 28.52,35.73 28.52,44.44 27.88,45.09 26.76,45.09 26.58,44.91 25.35,44.91 25.04,45.21 22.81,45.21 22.63,45.39 22.63,46.57 23.06,46.99 v1(24.13,46.99) ; v1(22.23,69.22) 22.23,70.28 22.43,70.48 U19.3 25.73,70.48 25.78,70.43 26.71,70.43 26.76,70.48 27.94,70.48 29.21,71.76 29.21,72.39 29.84,73.03 36.83,73.03 37.46,73.66 37.46,80.01 38.1,80.65 U16.7
  BOTTOM w0.203: v1(22.23,69.22) 17.61,69.22 17.39,69.43 15.63,69.43 13.11,66.92 13.11,62.51 16.51,59.11 16.51,48.26 17.78,46.99 v1(24.13,46.99)
BA2: length 118.9
  TOP w0.203: v1(24.13,48.26) 22.11,48.26 22.63,47.74 22.63,47.14 22.23,46.74 22.23,45.22 22.64,44.81 24.59,44.81 24.94,44.45 27.74,44.45 28.12,44.07 28.12,35.55 29.39,34.28 29.39,33.31 28.12,32.04 28.12,31.04 27.74,30.66 25.91,30.66 25.73,30.48 U20.16 ; U16.8 36.83,79.93 36.22,79.32 36.22,77.39 36.83,76.78 36.83,74.93 36.2,74.3 30.48,74.3 27.94,71.76 26.76,71.76 26.58,71.93 25.91,71.93 25.73,71.76 U19.5 21.79,71.76 21.59,71.55 v1(21.59,68.58)
  BOTTOM w0.203: v1(21.59,68.58) 20.43,68.58 20.28,68.73 19.09,68.73 18.94,68.58 17.67,68.58 17.22,69.03 15.8,69.03 13.52,66.75 13.52,62.68 17.14,59.05 17.14,48.46 17.35,48.26 v1(24.13,48.26)
BA3: length 117.2
  TOP w0.203: v1(24.13,48.89) 20.9,48.89 22.23,47.57 22.23,47.31 21.82,46.91 21.82,45.05 22.47,44.4 23.95,44.4 24.54,43.81 27.1,43.81 27.71,43.21 27.71,35.38 28.98,34.11 28.98,33.48 27.71,32.21 27.71,31.72 27.1,31.11 26.76,31.11 26.71,31.06 25.78,31.06 25.73,31.11 U20.17 ; U16.9 35.56,79.93 34.95,79.32 34.95,77.39 35.56,76.78 35.56,75.57 34.92,74.93 30.48,74.93 27.94,72.39 26.76,72.39 26.71,72.34 25.78,72.34 25.73,72.39 U19.6 21.16,72.39 20.95,72.19 v1(20.95,67.95)
  BOTTOM w0.203: v1(20.95,67.95) 20.49,67.95 20.11,68.33 19.26,68.33 19.06,68.12 17.55,68.12 17.05,68.62 15.97,68.62 13.93,66.58 13.93,62.91 17.78,59.05 17.78,49.1 17.98,48.89 v1(24.13,48.89)
BD0: length 19.1
  TOP w0.203: U19.13 29.01,76.84 29.21,77.04 29.21,88.82 29.41,89.03 U16.25
BD1: length 19.9
  TOP w0.203: U19.14 25.73,77.47 25.91,77.29 27.76,77.29 28.68,78.21 28.68,82.93 28.07,83.55 28.07,84.25 28.47,84.65 28.47,89.56 29.21,90.3 U16.24
BD2: length 19.4
  TOP w0.203: U16.23 29.34,91.57 28.58,90.81 28.58,90.24 28.07,89.73 28.07,84.82 27.66,84.42 27.66,83.38 28.28,82.76 28.28,79.48 27.53,78.74 26.76,78.74 26.71,78.79 25.78,78.79 25.73,78.74 U19.16
BD3: length 20
  TOP w0.203: U19.17 25.73,79.38 25.91,79.2 27.13,79.2 27.87,79.94 27.87,82.59 27.25,83.21 27.25,84.59 27.66,84.99 27.66,89.9 28.17,90.41 28.17,91.67 29.34,92.84 31.24,92.84
BD4: length 19.9
  TOP w0.203: U19.19 25.73,80.65 25.78,80.7 26.75,80.7 27.47,81.41 27.47,82.42 26.85,83.04 26.85,84.75 27.25,85.16 27.25,92.66 28.7,94.11 U16.21
BD5: length 21.1
  TOP w0.203: U19.20 25.73,81.28 25.91,81.1 26.58,81.1 27.06,81.58 27.06,82.25 26.44,82.87 26.44,84.92 26.85,85.33 26.85,94.16 28.07,95.38 U16.20
BD6: length 20.2
  TOP w0.203: U19.22 25.63,82.55 25.72,82.64 25.82,82.64 26.03,82.85 26.03,85.1 26.44,85.5 26.44,95.66 27.43,96.65 U16.19
BD7: length 21.2
  TOP w0.203: U19.23 25.2,83.19 25.63,83.61 25.63,84.03 25.33,84.33 25.33,84.97 26.03,85.67 26.03,97.16 26.8,97.92 31.24,97.92
BD8: length 55.4
  TOP w0.203: U21.23 29.64,59.69 29.84,59.49 29.84,56.92 32.18,54.58 32.18,37.74 32.28,37.64 34.26,37.64 35.1,36.8 35.51,36.39 35.51,30.92 35.1,30.51 34.26,29.67 32.86,29.67 32.18,28.99 32.18,25.08 28.69,21.59 U20.2
BD9: length 56.2
  TOP w0.203: U21.22 25.73,59.05 25.91,59.23 28.83,59.23 29.21,58.85 29.21,56.97 31.78,54.41 31.78,37.09 32.24,36.63 32.61,36.63 33.22,37.24 34.09,37.24 34.7,36.63 34.7,35.76 34.26,35.32 34.26,35.1 35.1,34.26 35.1,31.09 34.09,30.07 33.22,30.07 32.61,30.68 31.95,30.68 31.78,30.51 31.78,25.25 28.57,22.05 25.91,22.05 25.73,22.22 U20.3
BD10: length 48.6
  TOP w0.203: U20.5 25.73,23.49 25.91,23.67 27.94,23.67 30.61,26.34 31.01,26.6 31.37,26.96 31.37,30.68 33.3,32.61 34.09,32.61 34.7,33.22 34.7,34.09 34.09,34.7 33.59,34.7 31.37,36.92 31.37,54.24 28.75,56.86 28.75,57.4 28.37,57.78 26.76,57.78 26.58,57.61 25.91,57.61 25.73,57.78 U21.20
BD11: length 44.2
  TOP w0.203: U21.19 25.73,57.15 25.78,57.2 27.83,57.2 30.96,54.07 30.96,36.75 32.23,35.48 32.23,32.12 30.96,30.85 30.96,27.91 30.61,27.56 30.2,27.3 30.2,26.51 28.03,24.33 27.3,24.33 27.1,24.13 26.76,24.13 26.71,24.08 25.78,24.08 25.73,24.13 U20.6
BD12: length 42.2
  TOP w0.203: U20.8 25.73,25.4 25.91,25.58 28.69,25.58 29.79,26.68 29.79,27.52 30.2,27.78 30.56,28.14 30.56,31.02 31.83,32.29 31.83,35.31 30.56,36.58 30.56,53.84 28.52,55.88 26.76,55.88 26.58,55.7 25.91,55.7 25.73,55.88 U21.17
BD13: length 40.2
  TOP w0.203: 24.13,26.04 25.73,26.04 25.78,25.98 26.71,25.98 26.76,26.04 28.17,26.04 29.39,27.25 29.39,27.75 29.79,28.01 30.15,28.36 30.15,31.19 31.42,32.46 31.42,35.14 30.15,36.41 30.15,53.47 28.37,55.24 26.76,55.24 26.71,55.3 25.78,55.3 25.73,55.24 U21.16
BD14: length 37.6
  TOP w0.203: U20.11 25.73,27.3 25.91,27.48 28.49,27.48 28.98,27.97 29.08,28.03 29.39,28.23 29.74,28.59 29.74,31.36 31.01,32.63 31.01,34.97 29.74,36.24 29.74,52.75 28.52,53.98 26.76,53.98 26.58,53.8 25.91,53.8 25.73,53.98 U21.14
BD15: length 35.8
  TOP w0.203: U21.13 28.37,53.34 29.34,52.37 29.34,36.07 30.61,34.8 30.61,32.8 29.34,31.53 29.34,28.81 28.98,28.46 28.72,28.29 28.37,27.94 U20.12
D0: length 17.1
  BOTTOM w0.203: v1(0,83.82) 2.54,83.82 3.63,84.91 5.53,84.91 6.17,84.27 6.17,83.36 6.58,82.96 10.65,82.96 11.64,83.95 13.84,83.95 v1(14.61,83.19)
D1: length 16.1
  BOTTOM w0.203: v1(14.61,82.55) 14.16,82.55 13.17,83.54 11.81,83.54 10.82,82.55 4.8,82.55 3.99,81.73 3.99,81.46 3.81,81.28 v1(0,81.28)
D2: length 18.9
  BOTTOM w0.203: v1(14.61,81.28) 13.94,81.28 13.71,81.51 13.71,82.42 13,83.13 11.98,83.13 10.79,81.95 10.79,80.21 10.59,80.01 4.8,80.01 3.99,79.19 3.99,78.92 3.81,78.74 J1.26
D3: length 20.6
  BOTTOM w0.203: v1(0,76.2) 2.97,76.2 3.17,76.4 3.17,76.84 3.81,77.47 8.25,77.47 10.16,79.38 11.23,79.38 11.27,79.42 11.27,81.85 12.15,82.73 12.83,82.73 13.3,82.25 13.3,80.97 13.62,80.65 v1(14.61,80.65)
D4: length 19.8
  BOTTOM w0.203: v1(0,73.66) 2.54,73.66 3.81,74.93 8.25,74.93 8.48,75.16 8.48,75.83 11.68,79.02 11.68,80.35 12.15,80.82 12.83,80.82 13.3,80.35 13.3,79.71 13.73,79.29 13.91,79.29 14,79.38 v1(14.61,79.38)
D5: length 19.6
  BOTTOM w0.203: v1(14.56,78.77) 12.98,78.77 12.83,78.92 12.15,78.92 8.89,75.66 8.89,72.59 8.69,72.39 3.17,72.39 1.9,71.12 v1(0,71.12)
D6: length 85.7
  TOP w0.203: v1(0,68.58) 1.27,68.58 1.9,67.95 1.9,24.13 0.63,22.86 v1(0,22.86)
  BOTTOM w0.203: v1(0,22.86) 3.61,22.86 3.81,22.66 3.81,21.79 4.01,21.59 v1(14.61,21.59) ; v1(0,68.58) 1.9,68.58 3.17,69.85 9.32,69.85 9.52,70.05 9.52,75.57 11.43,77.47 11.97,77.47 12.15,77.29 14.43,77.29 v1(14.61,77.47)
D7: length 23.7
  BOTTOM w0.203: v1(0,66.04) 1.9,66.04 3.17,67.31 9.96,67.31 10.16,67.51 10.16,75.36 10.36,75.57 10.79,75.57 12.06,76.84 v1(14.61,76.84)
D9: length 15.9
  BOTTOM w0.203: v1(0,25.4) 3.17,25.4 4.44,24.13 11.08,24.13 12.98,22.22 v1(14.61,22.22)
D10: length 16.6
  BOTTOM w0.203: v1(14.61,23.49) 12.29,23.49 10.17,25.61 10.17,25.86 9.36,26.67 4.44,26.67 3.17,27.94 v1(0,27.94)
D11: length 17.9
  BOTTOM w0.203: v1(0,30.48) 3.17,30.48 4.44,29.21 8.31,29.21 10.58,26.94 10.58,25.78 12.23,24.13 v1(14.61,24.13)
D12: length 19.9
  BOTTOM w0.203: v1(0,33.02) 3.61,33.02 3.81,32.82 3.81,31.95 4.01,31.75 7.42,31.75 7.62,31.55 7.62,30.48 10.99,27.11 10.99,25.95 11.98,24.96 14.16,24.96 v1(14.61,25.4)
D13: length 22.4
  BOTTOM w0.203: v1(0,35.56) 2.34,35.56 2.54,35.36 2.54,34.49 2.74,34.29 8.05,34.29 8.25,34.09 8.25,30.48 11.39,27.34 11.39,26.12 12.15,25.36 13.25,25.36 13.92,26.04 v1(14.61,26.04)
D14: length 25
  BOTTOM w0.203: v1(14.61,27.3) 13.6,26.3 13.6,26.29 13.08,25.77 12.32,25.77 11.8,26.29 11.8,27.57 8.89,30.48 8.89,34.72 8.69,34.92 6.55,34.92 6.35,35.13 6.35,36.63 6.15,36.83 2.74,36.83 2.54,37.03 2.54,37.9 2.34,38.1 v1(0,38.1)
D15: length 25.8
  BOTTOM w0.203: v1(14.61,27.94) 14,27.94 13.2,27.14 13.2,26.46 12.91,26.17 12.49,26.17 12.2,26.46 12.2,27.8 9.52,30.48 9.52,35.2 5.36,39.37 2.74,39.37 2.54,39.57 2.54,40.44 2.34,40.64 v1(0,40.64)
DDIR: length 90.3
  TOP w0.203: U7.19 37.03,38.73 36.83,38.53 36.83,24.97 36.63,24.77 33.45,24.77 32.61,23.93 32.61,23.72 28.58,19.68 24.77,19.68 24.13,20.32 U20.1 28.63,20.95 32.59,24.91 32.59,26.72 33.4,27.53 34.09,27.53 35.51,28.96 35.92,29.36 35.92,37.95 35.51,38.35 34.09,39.78 33.22,39.78 32.59,40.41 32.59,54.75 30.48,56.86 30.48,60.12 30.28,60.32 U21.24
DEN/: length 139.1
  TOP w0.203: v1(10.16,84.46) 10.16,84.89 9.96,85.09 3.38,85.09 3.17,84.89 v1(3.17,21.59) ; U19.25 14.1,84.46 v1(12.7,84.46) ; U7.20 42.55,40.01 42.55,25.4 42.09,24.94 40.67,24.94 38.79,23.06 34.7,23.06 34.09,22.45 31.92,22.45 28.74,19.28 23.9,19.28 22.23,20.95 v1(14.73,20.95)
  BOTTOM w0.203: v1(10.16,84.46) v1(12.7,84.46) ; v1(3.17,21.59) 2.74,21.59 2.54,21.39 2.54,19.25 2.74,19.05 6.35,19.05 8.25,20.95 v1(14.73,20.95)
GAIN: length 25.9
  TOP w0.203: U6.6 v1(98.42,11.43) ; v1(98.78,33.02) U5.6
  BOTTOM w0.203: v1(98.78,33.02) 98.98,32.82 98.98,14.53 98.42,13.97 v1(98.42,11.43)
MRD/: length 35.8
  TOP w0.203: J1.46 v1(22.23,31.11)
  BOTTOM w0.203: U7.9 32.61,31.11 32.44,30.94 25.91,30.94 25.73,31.11 v1(22.23,31.11)
MWR/: length 36.4
  TOP w0.203: J1.45 6.28,45.72 22.23,29.78 v1(22.23,28.57)
  BOTTOM w0.203: v1(22.23,28.57) v1(33.66,28.57)
N00036_6360: length 60.5
  TOP w0.203: U6.5 v1(96.52,12.7) 94.82,12.7 94.61,12.5 94.61,11.6 95.43,10.78 97.76,10.78 98.12,10.42 98.12,9.9 97.76,9.54 94.79,9.54 93.98,8.72 93.98,0.2 93.78,0 L6.2 88.9,0 84.79,4.11 84.79,4.21 79.54,9.46 79.54,10.76 77.6,12.7 U1.5 74.5,12.7 74.29,12.9 74.29,16.31 74.5,16.51 U1.8
  BOTTOM w0.203: v1(96.52,12.7) R4.1 95.25,12.07 95.25,13.77 96.72,15.24 R3.1
N00038_6372: length 38.8
  TOP w0.203: L3.2 82.55,5.08 82.12,5.08 79.13,8.07 79.13,10.5 78.2,11.43 v1(76.2,11.43)
  BOTTOM w0.203: C21.1 71.75,7.08 71.4,6.72 71.4,3.84 71.58,3.66 74.47,3.66 76.53,5.71 80.44,5.71 80.64,5.92 80.64,10.59 80.26,10.97 77.98,10.97 77.8,10.8 76.4,10.8 76.2,11 v1(76.2,11.43)
N00044_6366: length 18.1
  TOP w0.203: U23.2 90.53,15.14 90.63,15.24 91.24,15.24 91.44,15.04 91.44,14.17 91.64,13.97 98.86,13.97 99.06,13.77 99.06,9.09 99.26,8.89 U6.1
N00046_6362:
  vias: v1(96.52,8.66)
N00048_6359: length 7
  TOP w0.203: v1(99.69,13.97) 99.69,10.36 99.9,10.16 U6.2
  BOTTOM w0.203: v1(99.69,13.97) 99.69,15.01 R3.2
N00060_6368: length 14.2
  TOP w0.203: U23.3 87.63,16.31 87.43,16.51 83.39,16.51 83.18,16.31 83.18,14.17 82.98,13.97 U1.6
OUTA: length 10.9
  BOTTOM w0.203: L1.1 83.14,19 83.14,11.88 83.49,11.53 U23.6
OUTC: length 9.4
  TOP w0.203: v1(83.82,23.49) 84.79,24.46 84.79,27.71 83.82,28.67 83.82,29.21 U22.6
RA0: length 113.3
  TOP w0.203: U13.5 77.47,83.03 78.1,82.4 78.1,71.27 77.47,70.64 U8.5 77.47,69.06 78.1,68.43 78.1,57.3 77.47,56.67 ; 77.47,56.67 77.47,61.39 77.67,61.59 94.82,61.59 95.02,61.39 95.02,54.09 97.04,52.07 101.4,52.07 101.6,52.27 U11.5 101.6,56.67 102.23,57.3 102.23,68.43 101.6,69.06 U10.5 101.6,70.64 102.23,71.27 102.23,82.4 101.6,83.03 U3.5 101.6,84.61 102.23,85.24 102.23,96.37 101.6,97 U4.5 ; 77.47,56.67 U12.5
RA1: length 113.4
  TOP w0.203: 76.83,62.23 95.22,62.23 95.43,62.03 95.43,54.26 96.98,52.7 100.13,52.7 100.33,52.91 U11.4 100.33,56.67 100.96,57.3 100.96,68.43 100.33,69.06 U10.4 100.33,70.64 100.96,71.27 100.96,82.4 100.33,83.03 U3.4 100.33,84.61 100.96,85.24 100.96,96.37 100.33,97 U4.4 ; 76.83,62.23 76.83,57.3 76.2,56.67 ; 76.83,62.23 76.2,61.59 76.2,56.67 ; 76.83,62.23 76.83,68.43 76.2,69.06 U8.4 76.2,70.64 76.83,71.27 76.83,82.4 76.2,83.03 U13.4 ; U12.4 76.2,56.67
RA2: length 119.4
  TOP w0.203: 75.56,76.84 75.56,82.4 74.93,83.03 U13.3 ; 75.56,76.84 75.56,71.27 74.93,70.64 ; 75.56,76.84 74.93,76.2 74.93,70.64 ; 74.93,70.64 U8.3 74.93,69.06 75.56,68.43 75.56,57.3 74.93,56.67 ; 74.93,56.67 U12.3 ; 74.93,56.67 74.93,60.96 76.83,62.87 95.68,62.87 95.88,62.66 95.88,54.38 96.92,53.34 98.86,53.34 99.06,53.54 U11.3 99.06,56.67 99.69,57.3 99.69,68.43 99.06,69.06 U10.3 99.06,70.64 99.69,71.27 99.69,82.4 99.06,83.03 U3.3 99.06,84.61 99.69,85.24 99.69,96.37 99.06,97 U4.3
RA3: length 107.3
  TOP w0.203: U13.2 73.66,83.03 74.29,82.4 74.29,71.27 73.66,70.64 U8.2 73.66,69.06 74.29,68.43 74.29,57.3 73.66,56.67 ; 97.79,56.67 97.79,61.59 95.88,63.5 76.83,63.5 73.66,60.32 73.66,56.67 ; 97.79,56.67 U11.2 ; 97.79,56.67 98.42,57.3 98.42,68.43 97.79,69.06 U10.2 97.79,70.64 98.42,71.27 98.42,82.4 97.79,83.03 U3.2 97.79,84.61 98.42,85.24 98.42,96.37 97.79,97 U4.2 ; U12.2 73.66,56.67
RA4: length 72.5
  TOP w0.203: U9.32 72.39,106.53 73.02,105.89 73.02,94.77 72.39,94.13 U13.32 72.39,92.56 73.02,91.92 73.02,80.8 72.39,80.16 U8.32 ; U4.32 96.52,106.53 97.16,105.89 97.16,94.77 96.52,94.13 U3.32 96.52,92.56 97.16,91.92 97.16,80.8 96.52,80.16 U10.32 96.52,78.59 97.16,77.95 97.16,66.83 96.52,66.19 U11.32
RA5: length 72.5
  TOP w0.203: U8.31 73.66,80.16 74.29,80.8 74.29,91.92 73.66,92.56 U13.31 73.66,94.13 74.29,94.77 74.29,105.89 73.66,106.53 U9.31 ; U4.31 97.79,106.53 98.42,105.89 98.42,94.77 97.79,94.13 U3.31 97.79,92.56 98.42,91.92 98.42,80.8 97.79,80.16 U10.31 97.79,78.59 98.42,77.95 98.42,66.83 97.79,66.19 U11.31
RA6: length 72.5
  TOP w0.203: U8.30 74.93,80.16 75.56,80.8 75.56,91.92 74.93,92.56 U13.30 74.93,94.13 75.56,94.77 75.56,105.89 74.93,106.53 U9.30 ; U4.30 99.06,106.53 99.69,105.89 99.69,94.77 99.06,94.13 U3.30 99.06,92.56 99.69,91.92 99.69,80.8 99.06,80.16 U10.30 99.06,78.59 99.69,77.95 99.69,66.83 99.06,66.19 U11.30
RA7: length 111.9
  TOP w0.203: U9.29 76.2,106.53 76.83,105.89 76.83,94.77 76.2,94.13 U13.29 76.2,92.56 76.83,91.92 76.83,80.8 76.2,80.16 U8.29 ; v1(100.33,108.59) v1(100.33,107.32) 100.33,106.53 100.96,105.89 100.96,94.77 100.33,94.13 U3.29 100.33,92.56 100.96,91.92 100.96,80.8 100.33,80.16 U10.29 100.33,78.59 100.96,77.95 100.96,66.83 100.33,66.19 U11.29 ; v1(81.91,114.94) v1(78.1,114.94)
  BOTTOM w0.203: v1(100.33,108.59) 100.33,114.73 100.13,114.94 v1(81.91,114.94) ; v1(76.7,107.32) 76.7,107.52 76.41,107.81 76.2,107.81 76.2,114.73 76.4,114.94 v1(78.1,114.94)
RA8: length 112.9
  TOP w0.203: v1(101.6,107.32) 101.6,106.53 102.23,105.89 102.23,94.77 101.6,94.13 U3.28 101.6,92.56 102.23,91.92 102.23,80.8 101.6,80.16 U10.28 101.6,78.59 102.23,77.95 102.23,66.83 101.6,66.19 U11.28 ; v1(81.28,115.57) 77.67,115.57 77.47,115.37 U9.28 77.47,106.53 78.1,105.89 78.1,94.77 77.47,94.13 U13.28 77.47,92.56 78.1,91.92 78.1,80.8 77.47,80.16 U8.28
  BOTTOM w0.203: v1(81.28,115.57) 101.4,115.57 101.6,115.37 v1(101.6,107.32)
RA9: length 88.9
  TOP w0.203: U11.22 109.85,66.04 109.85,77.34 109.22,77.98 U10.22 109.85,80.01 109.85,91.31 109.22,91.95 U3.22 109.85,93.98 109.85,105.28 109.22,105.92 U4.22 109.22,110.49 108.18,111.53 93.81,111.53 93.09,110.81 93.09,110.07 92.25,109.22 v1(90.8,109.22) ; v1(86.36,109.22) 85.29,109.22 85.09,109.02 U9.22 85.09,106.53 85.72,105.89 85.72,94.77 85.09,94.13 U13.22
  BOTTOM w0.203: v1(90.8,109.22) v1(86.36,109.22)
